# Altium PCB KAAI3020_TESTPcbDoc.PcbDoc (part 1 of 3)
Units mil, origin at the board's own origin, x right, y up, seen from the top; angles counter-clockwise.
Board outline 6000 x 5905.51 mil, 4 copper layers (Top Layer, Inner Layer L2, Inner Layer L3, Bottom Layer), stack 62.449 mil thick; 253 components, 94 nets, 550 pads, 119 vias.
Unrouted connection lines stored in the file: 5.
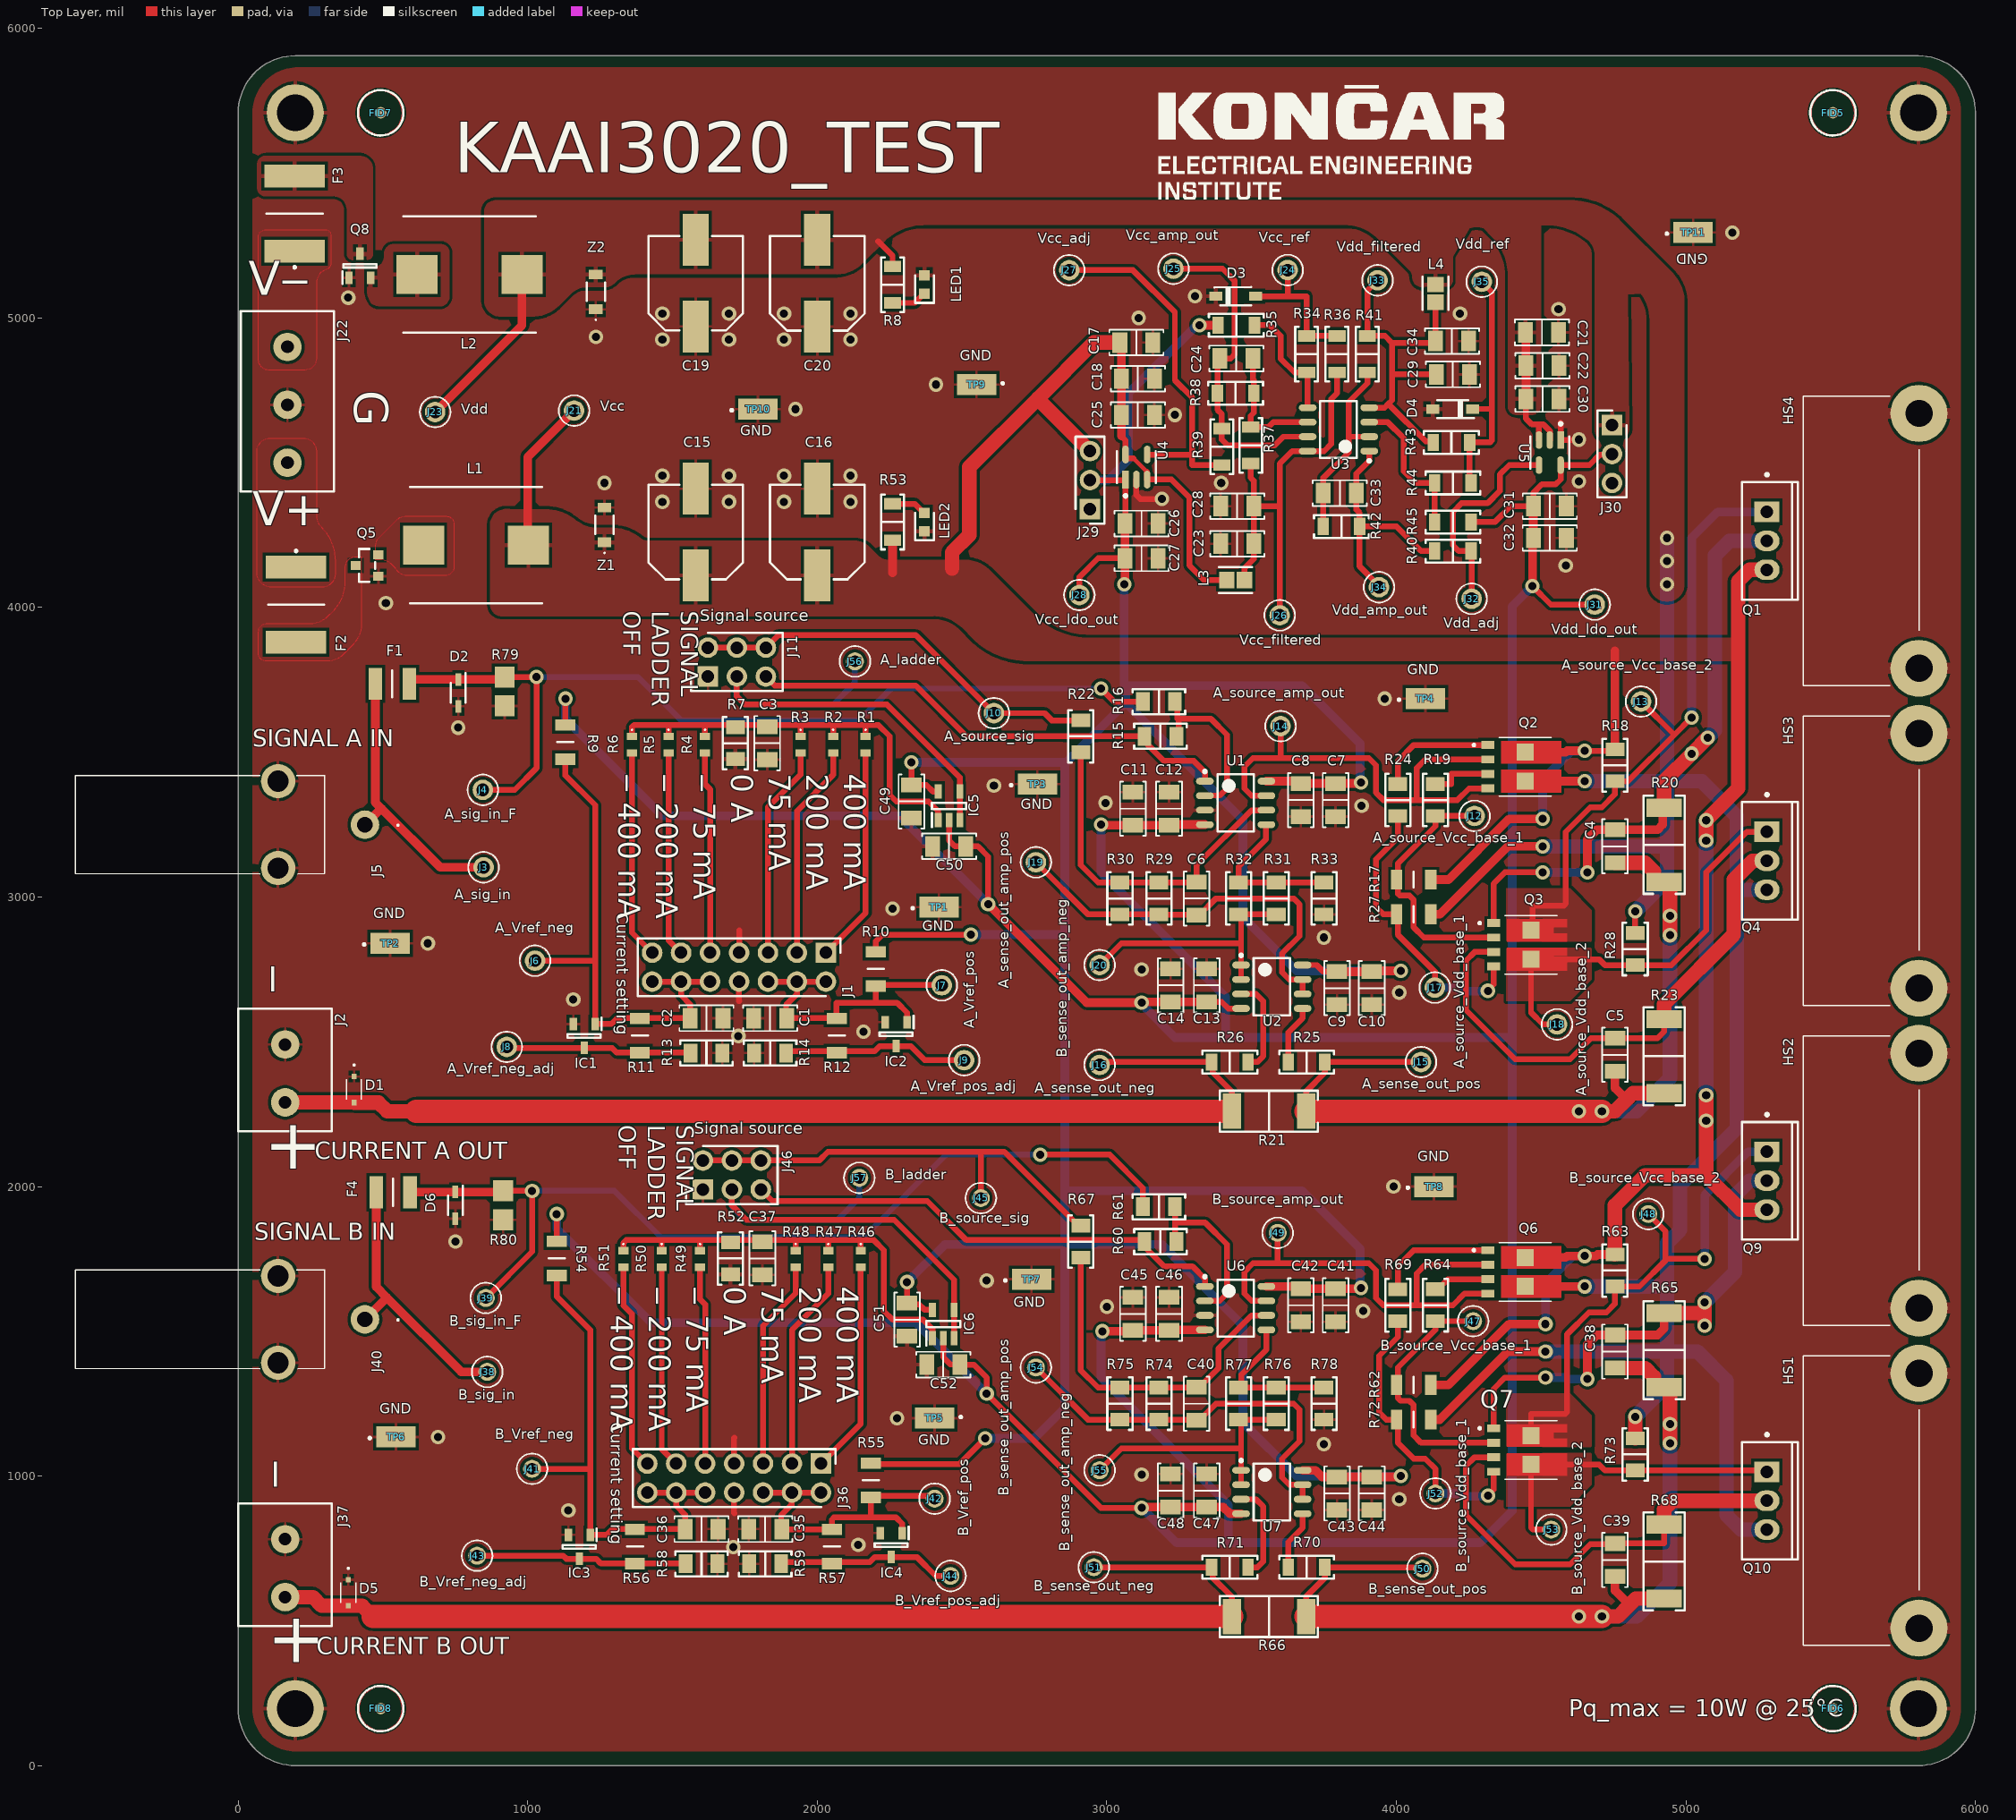
[diagram p0: Top Layer view]
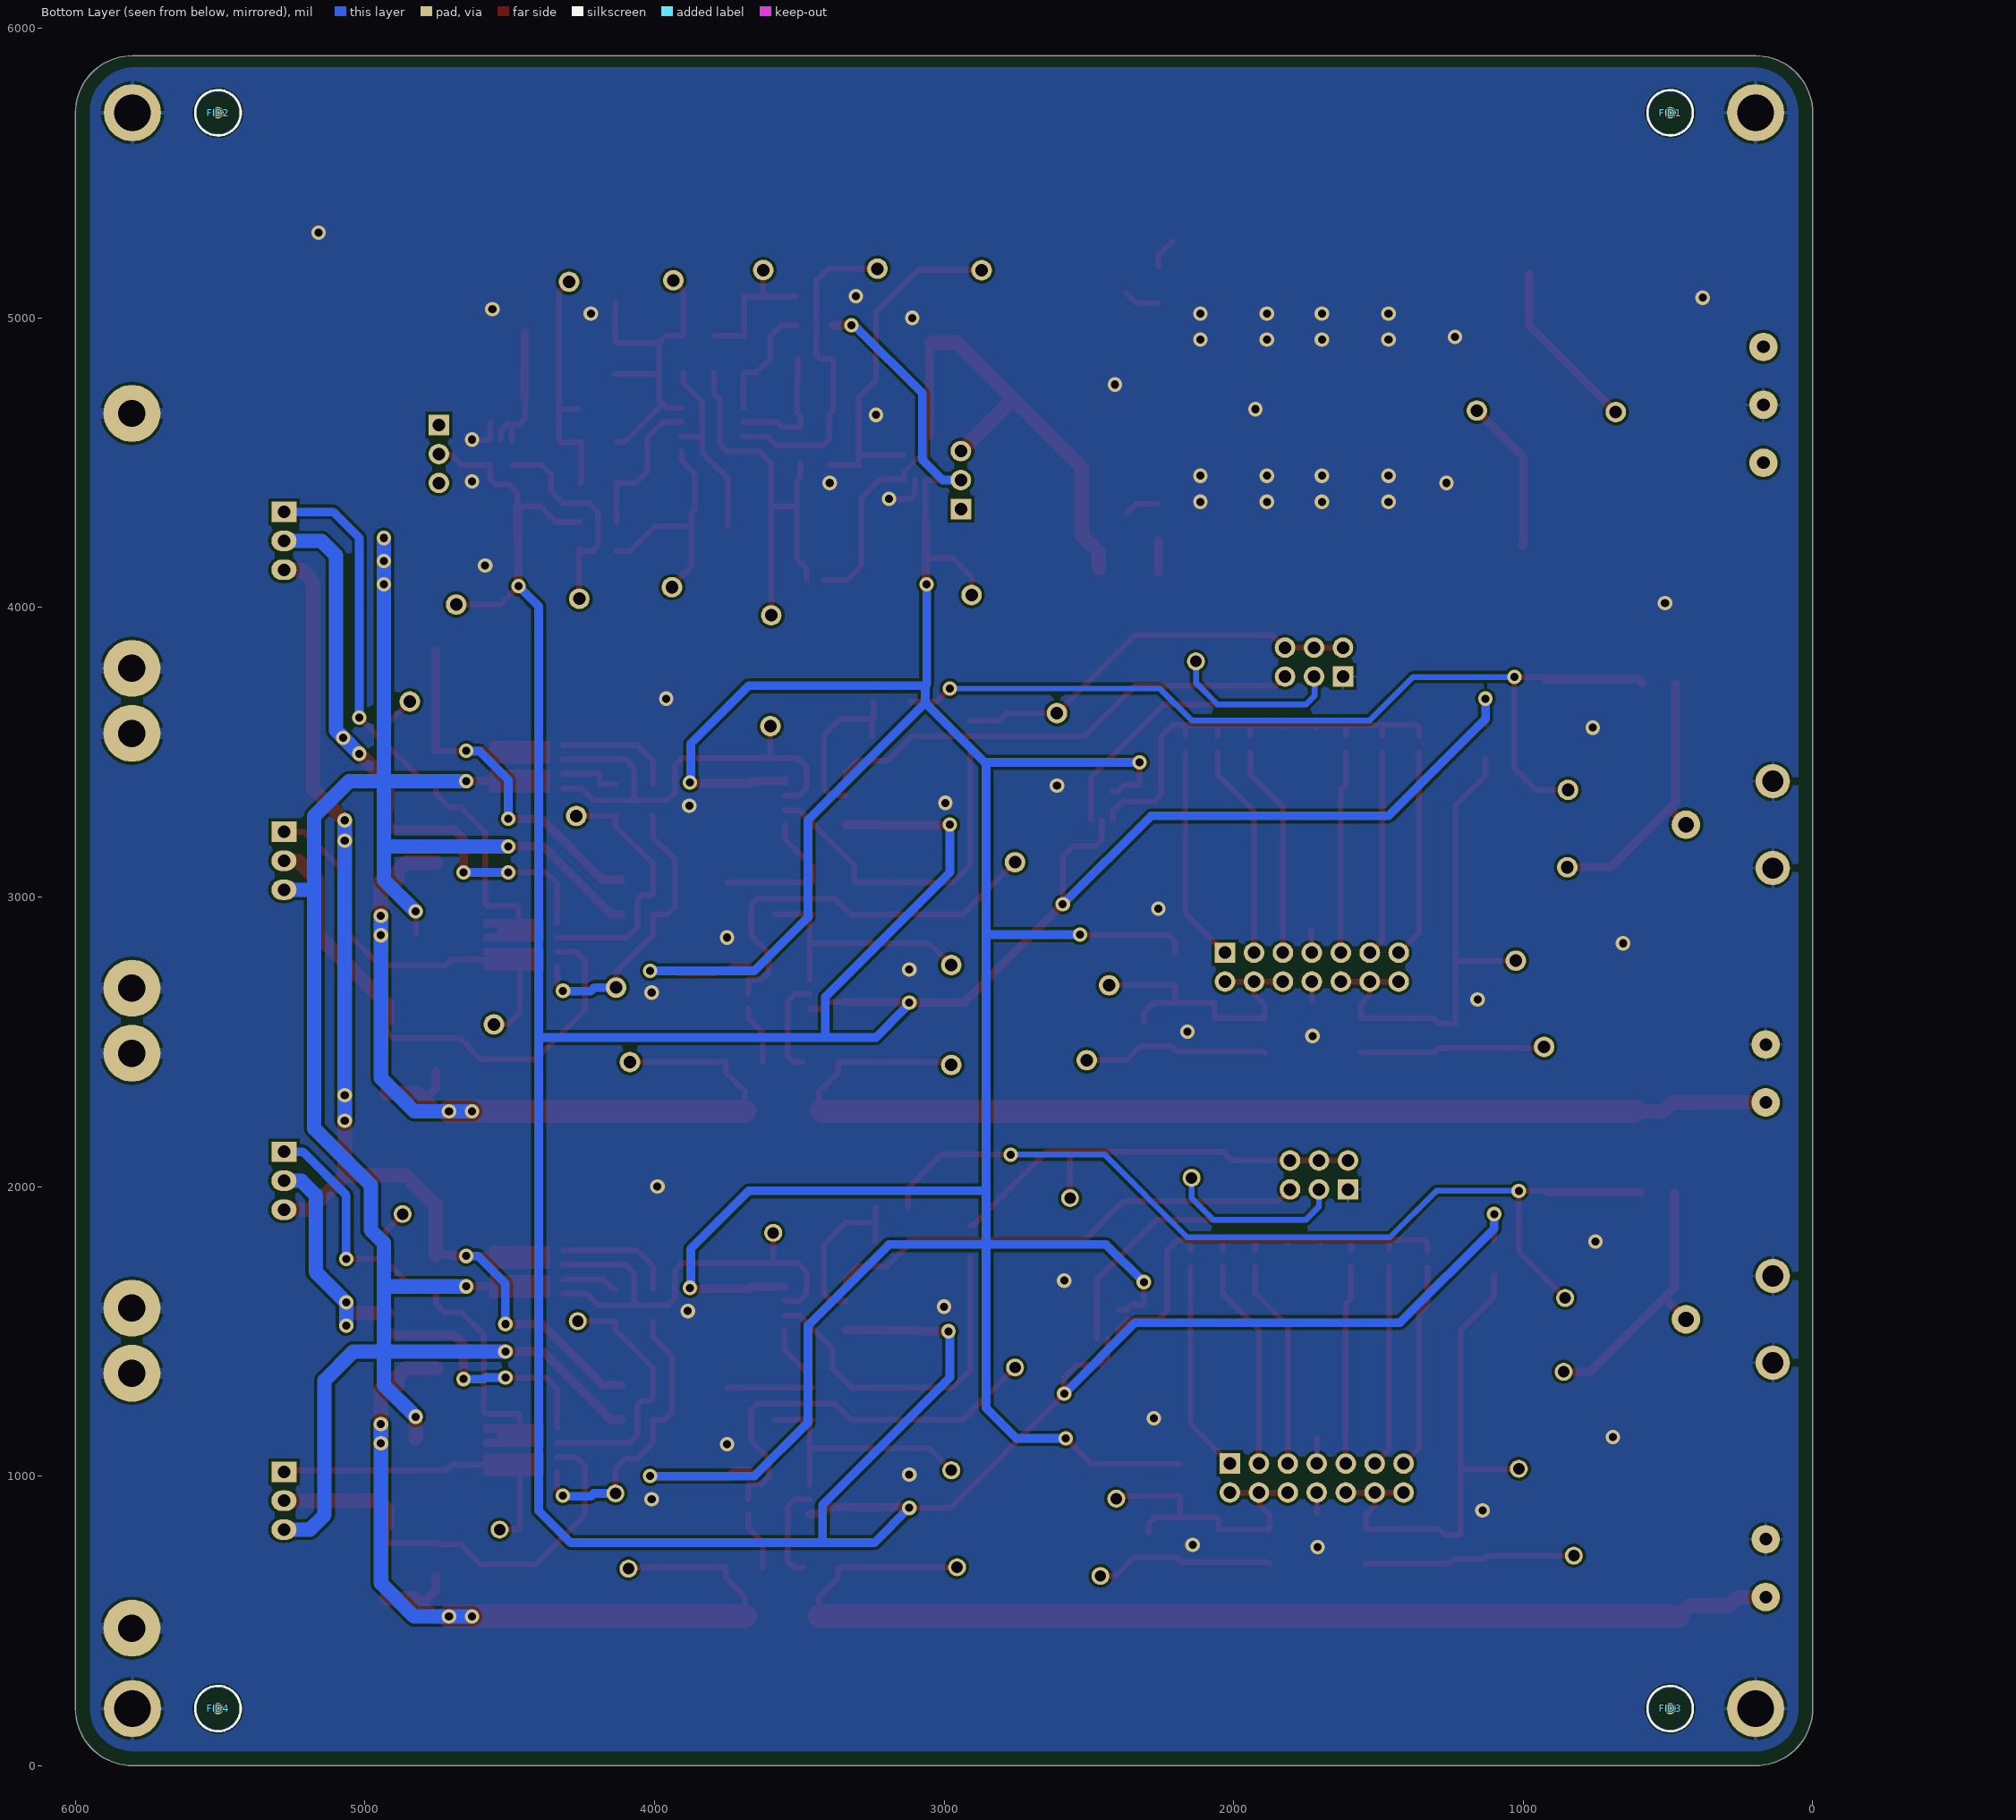
[diagram p1: Bottom Layer view, seen from below]
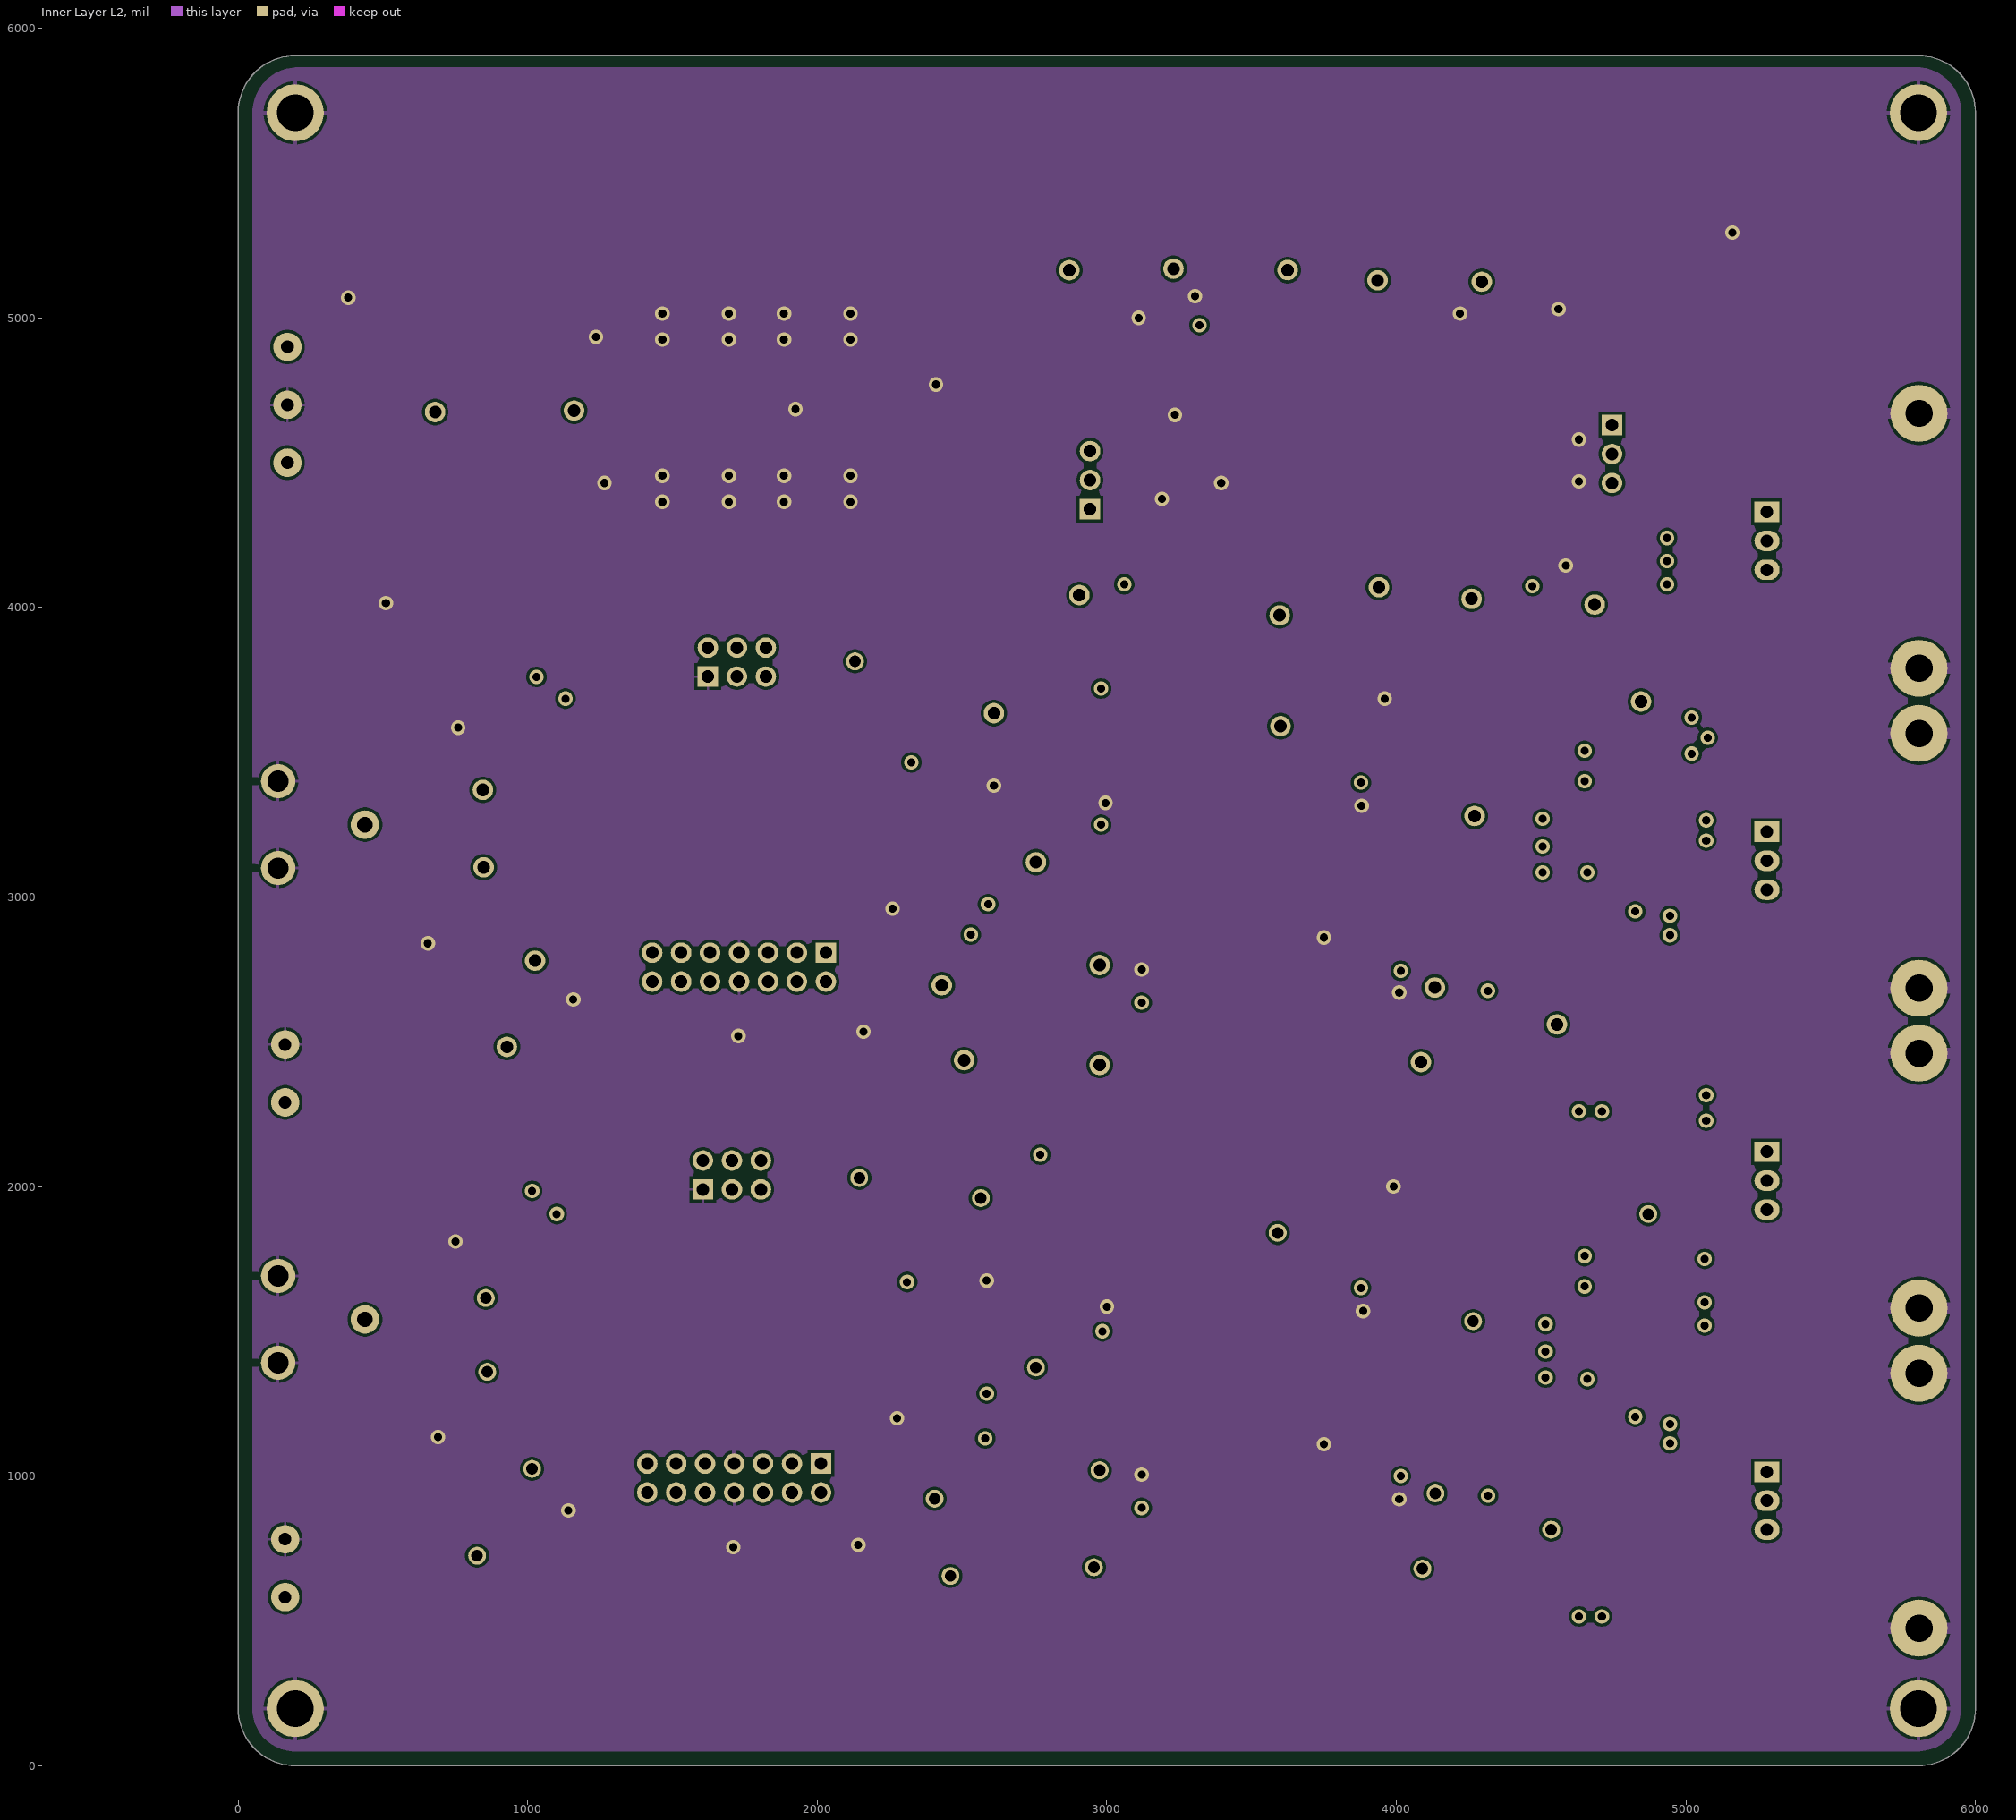
[diagram p2: Inner Layer L2]
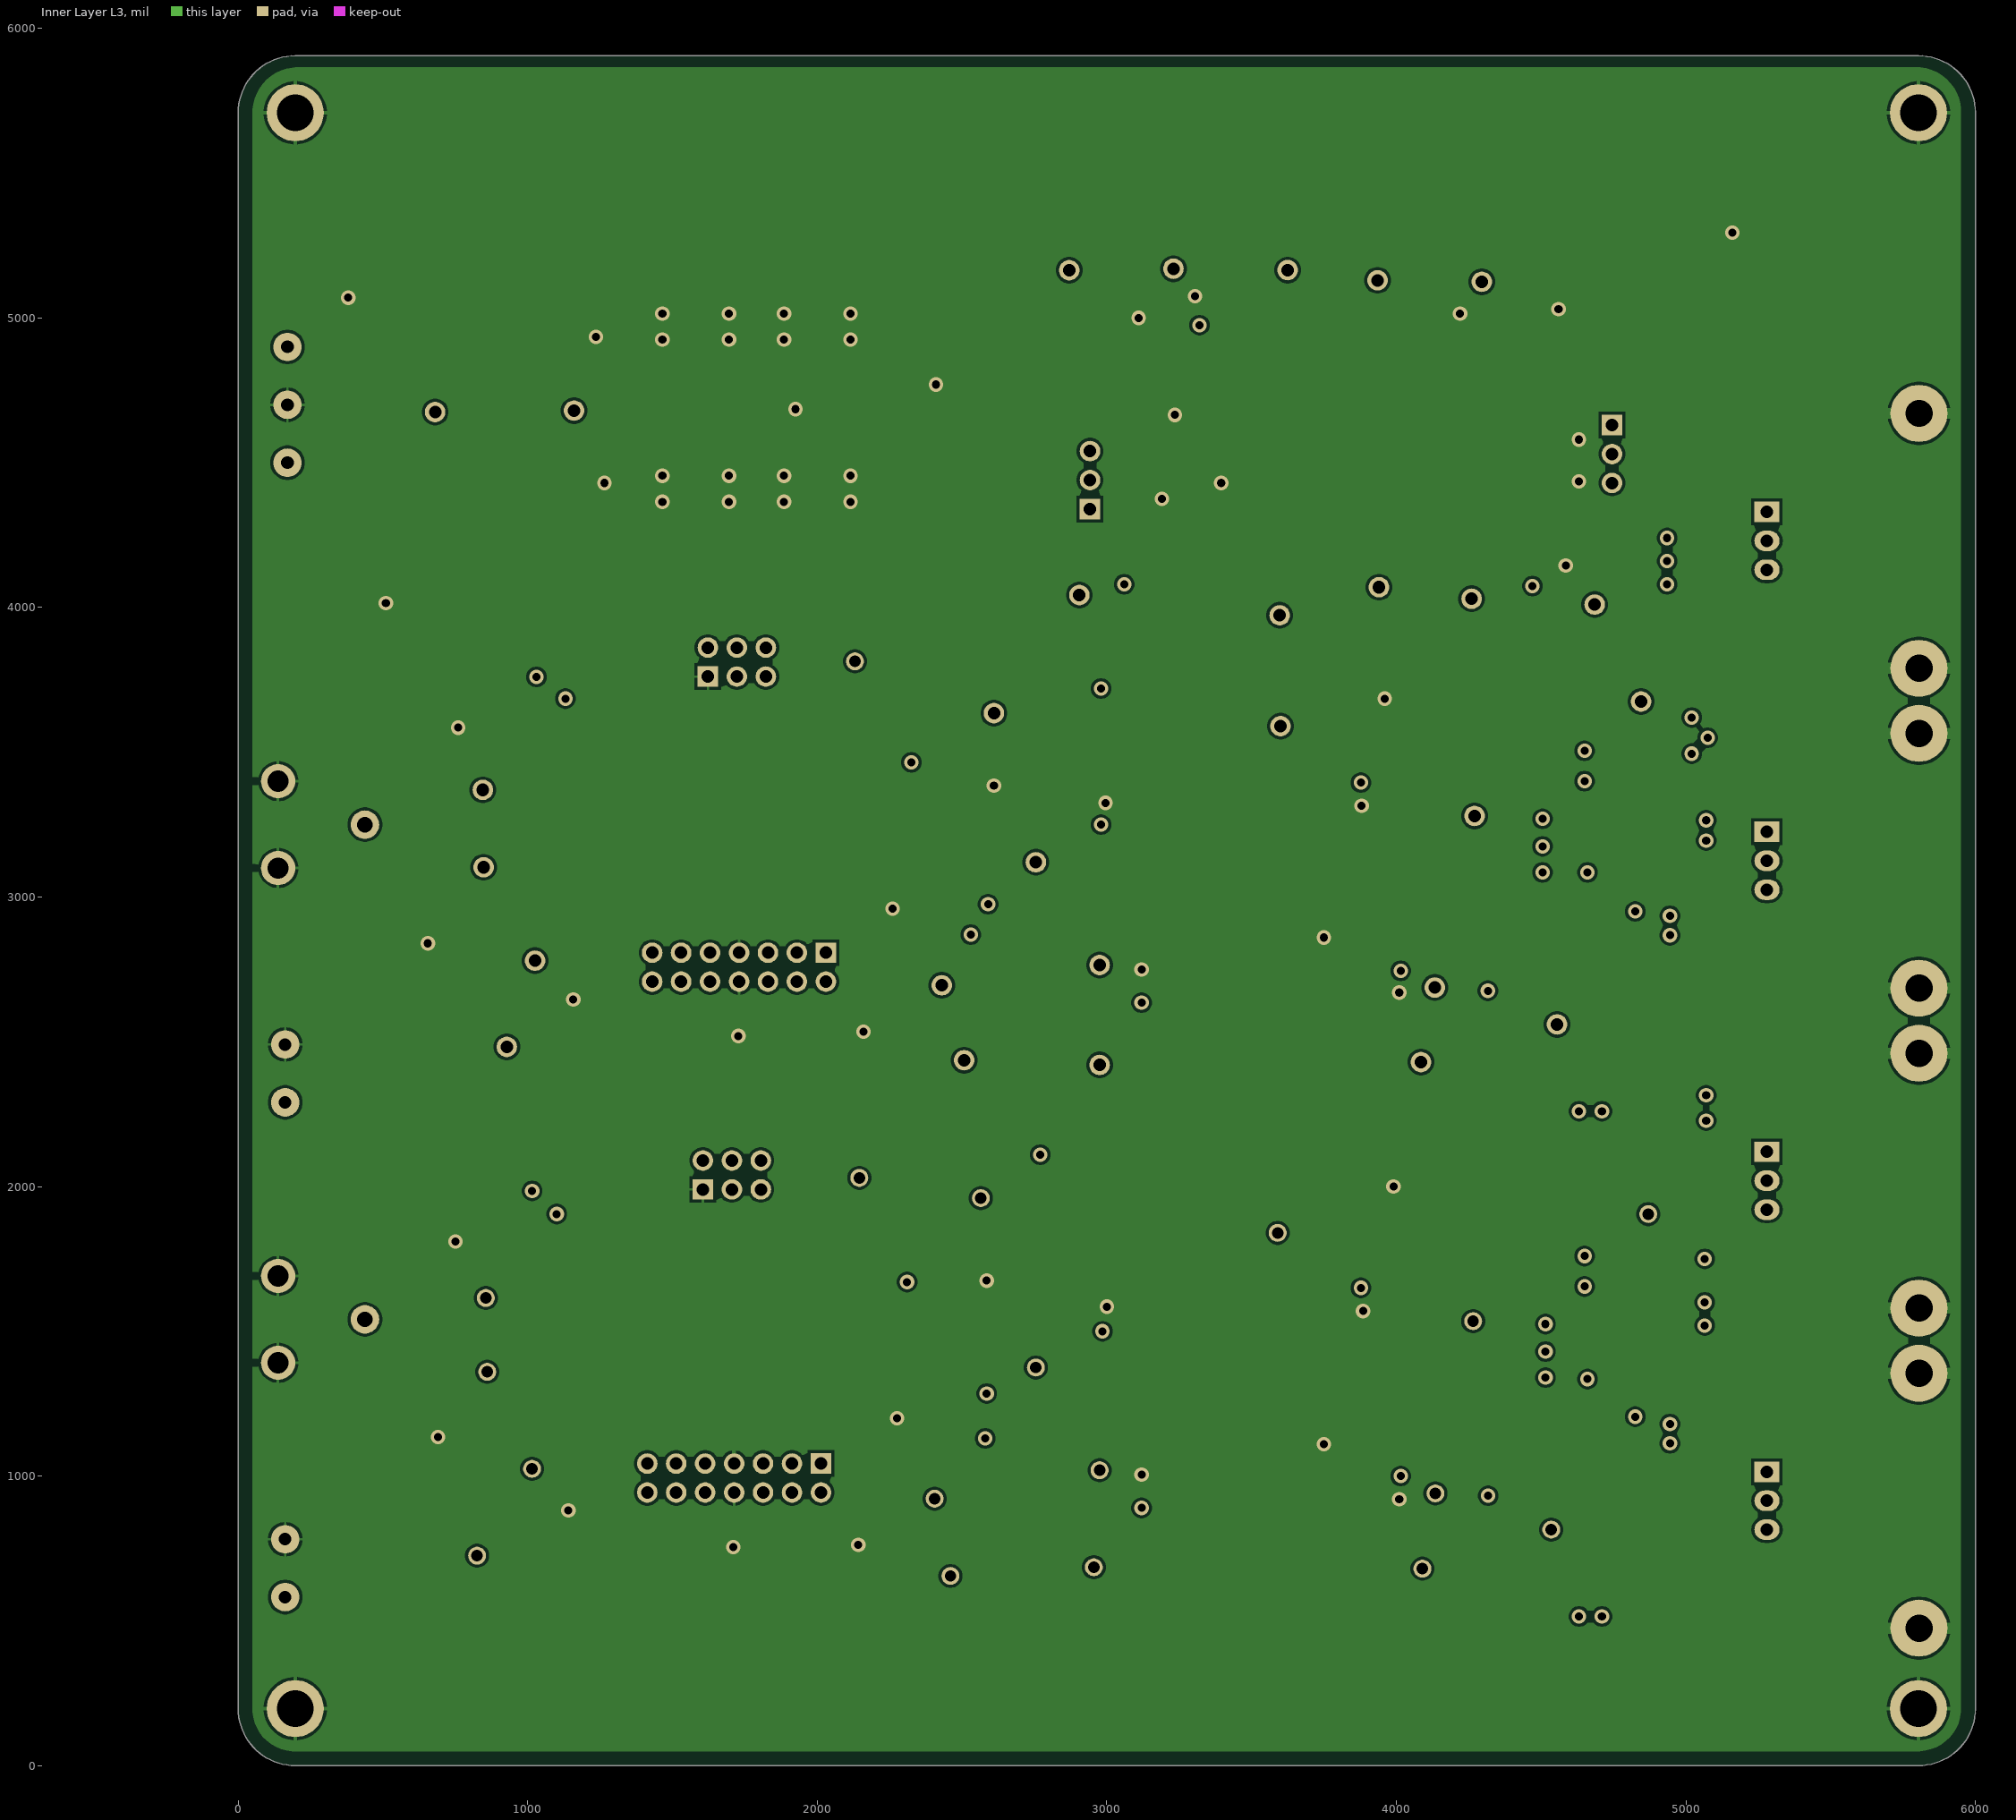
[diagram p3: Inner Layer L3]
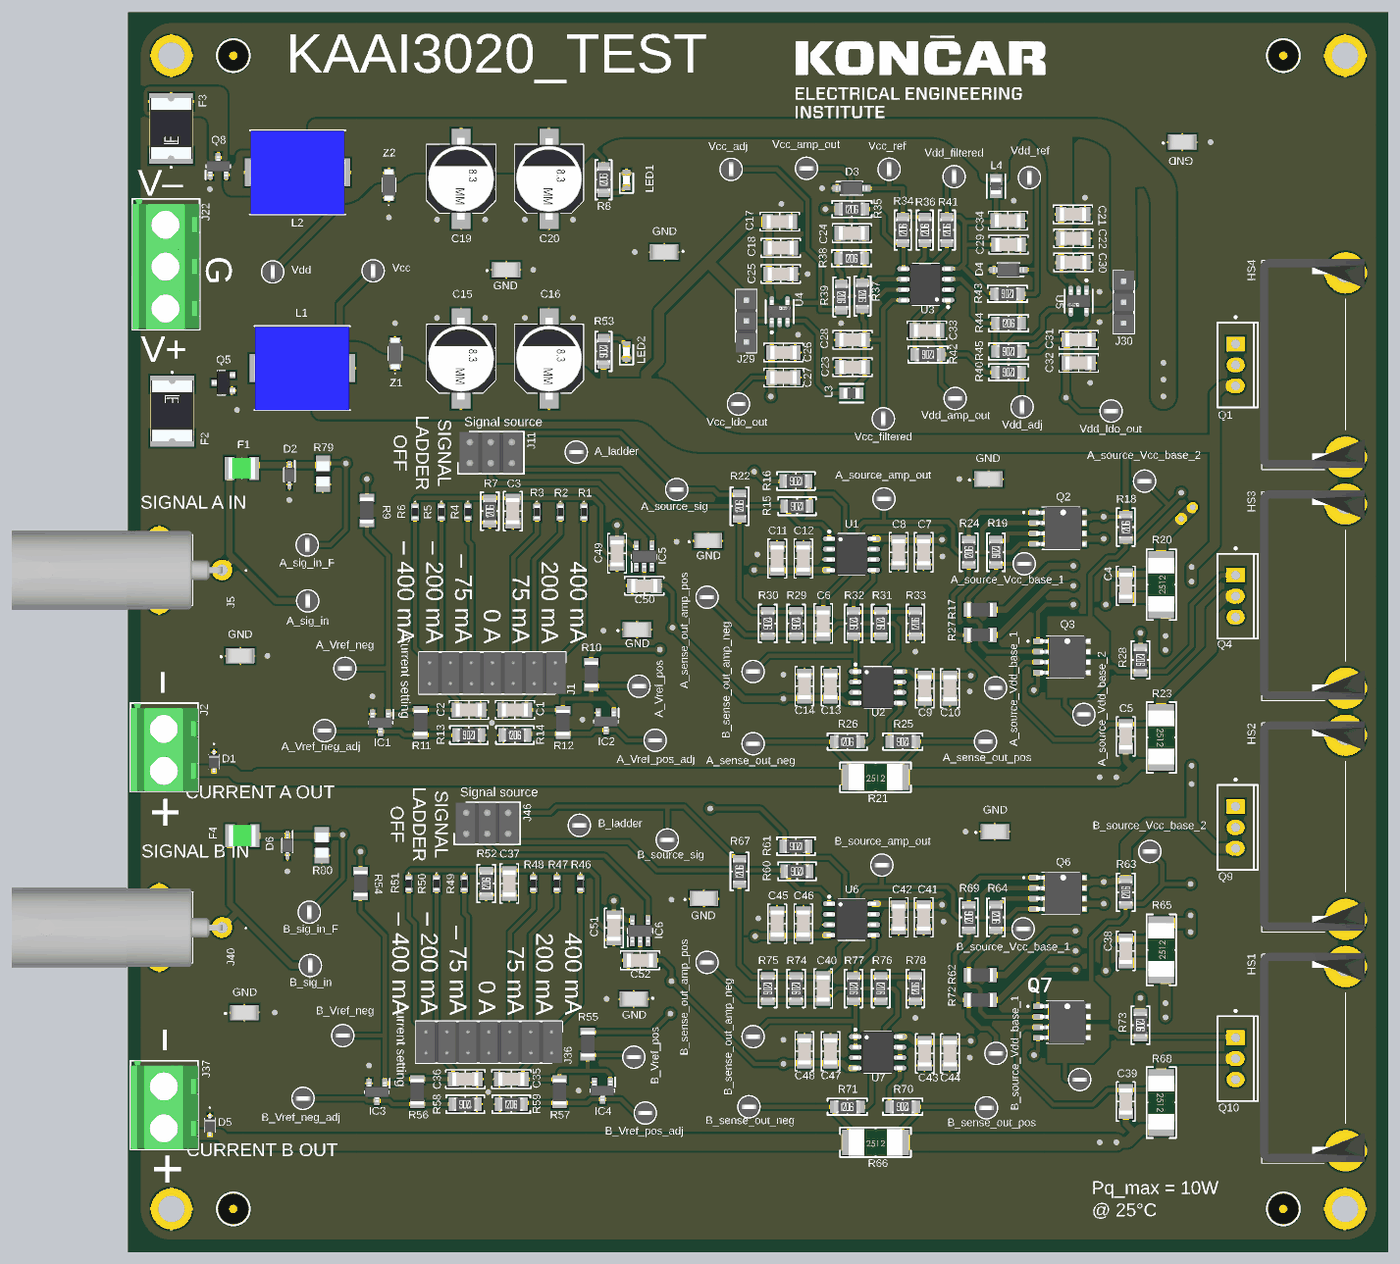
[diagram p5: 3D render of the assembled board from above, using the file's embedded part models]

## Layer stack, top to bottom
Top Solder: solder mask 0.4, Solder Resist, Dk 3.5
Top Layer: signal copper 1.378
Dielectric 2: prepreg 8.2835, PP-023, Dk 4.5
Inner Layer L2: signal copper 0.5984
Dielectric 1: core 41.9291, Core-042, Dk 4.6
Inner Layer L3: signal copper 0.5984
Dielectric 3: prepreg 8.2835, PP-023, Dk 4.5
Bottom Layer: signal copper 1.378
Bottom Solder: solder mask 0.4, Solder Resist, Dk 3.5

## Board outline
0,196.85 ccw(c196.85,196.85) 196.85,0 5803.15,0 ccw(c5803.15,196.85) 6000,196.85 6000,5708.66 ccw(c5803.15,5708.66) 5803.15,5905.51 196.85,5905.51 ccw(c196.85,5708.66) 0,5708.66

## Design rules (kind name [scope] priority, off if disabled: settings)
AcuteAngle [All] p1: minimum=8.50000000000000E+0001 checktracksonly=FALSE
BoardOutlineClearance [All AND NOT InComponentClass('OutOfBoardComponents')] p1: gap=11.81 ignorepadtopadclearanceinfootprint=FALSE except(15.75: Arc-SplitBarrior Arc-SplitContinuation Track-SplitBarrior Track-SplitContinuation SMDPad-SplitBarrior SMDPad-SplitContinuation THPad-SplitBarrior THPad-SplitContinuation Via-SplitBarrior Via-SplitContinuation Fill-SplitBarrior Fill-SplitContinuation Poly-SplitBarrior Poly-SplitContinuation Region-SplitBarrior Region-SplitContinuation Text-SplitBarrior Text-SplitContinuation)
Clearance Clearance_1 [All] p1: gap=10 ignorepadtopadclearanceinfootprint=TRUE except(0: Arc-Hole Track-Hole SMDPad-Hole THPad-Hole Via-Hole Fill-Hole Poly-Hole Region-Hole Text-Hole; 20: Track-Region SMDPad-Region Via-Region Fill-Region)
Clearance "Clearance Different Nets" [All] p2: gap=10 ignorepadtopadclearanceinfootprint=TRUE except(20: THPad-THPad Via-Hole)
Clearance "Clearance Same Nets" [All] p3: gap=7.87 ignorepadtopadclearanceinfootprint=FALSE except(3.5: Arc-Arc Arc-Track Arc-SMDPad Track-Track Track-SMDPad SMDPad-SMDPad; 5: SMDPad-Via THPad-Via; 10: Arc-Via Arc-Text Track-Via Track-Text SMDPad-Text THPad-Text Via-Via Via-Text Fill-Text Poly-Text Region-Text Text-Text)
Clearance "Clearance Bottom Layer" [OnLayer('Bottom Layer')] p4: gap=8 ignorepadtopadclearanceinfootprint=TRUE except(10: Arc-Text Track-Text SMDPad-Text THPad-Text Via-Text Fill-Text Poly-Text Region-Text Text-Text)
Clearance "Clearance Top Layer" [OnLayer('Top Layer')] p5: gap=8 ignorepadtopadclearanceinfootprint=TRUE except(10: Arc-Text Track-Text SMDPad-Text THPad-Text Via-Text Fill-Text Poly-Text Region-Text Text-Text)
Height [All] p1: minheight=0 maxheight=10000 prefheight=500
HoleSize [All] p1: absolutevalues=TRUE maxlimit=248.03 minlimit=7.87 maxpercent=80.000 minpercent=20.000
MinimumAnnularRing [All] p1: minimumring=5.12
MinimumSolderMaskSliver [All] p1: minsoldermaskwidth=3.94
PolygonConnect NoReliefPolygonConnect [InPadClass('NoThermalReliefPads') OR IsVia] p1: connectstyle=Direct reliefconductorwidth=10 reliefentries=4 polygonreliefangle="90 Angle" airgapwidth=10
PolygonConnect [All] p2: connectstyle=Relief reliefconductorwidth=15 reliefentries=4 polygonreliefangle="90 Angle" airgapwidth=10
RoutingCorners [All] p1: cornerstyle=Round minsetback=100 maxsetback=100
RoutingVias [All] p1: holewidth=19.68 width=39.37 viastyle="Through Hole" minholewidth=7.87 minwidth=13.78 maxholewidth=39.37 maxwidth=78.74
SilkToSilkClearance [All] p1: silktosilkclearance=3.94
SilkToSolderMaskClearance [IsPad] p1: minsilkscreentomaskgap=3.94 clearancetoexposedcopper=TRUE
SolderMaskExpansion [All] p1: expansion=4 istentingtop=FALSE
Width [All] p1: maxlimit=100 minlimit=3.5 preferedwidth=15
24 further rules are at their usual default settings.

## Classes and differential pairs
component class OutOfBoardComponents: J2 J5 J22 J37 J40 Q1 Q4 Q9 Q10
component class source_B: C38 C39 C40 C41 C42 C43 C44 C45 C46 C47 C48 HS3 HS4 J47 J48 J49 J50 J51 J52 J53 J54 J55 Q6 Q7 Q9 Q10 R60 R61 R62 R63 R64 R65 R66 R67 R68 R69 R70 R71 R72 R73 R74 R75 R76 R77 R78 TP7 TP8 U6 U7
component class misc_B: C35 C36 C37 C51 C52 D5 D6 F4 IC3 IC4 IC6 J36 J37 J38 J39 J40 J41 J42 J43 J44 J45 J46 J57 R46 R47 R48 R49 R50 R51 R52 R54 R55 R56 R57 R58 R59 R80 TP5 TP6
component class source_A: C4 C5 C6 C7 C8 C9 C10 C11 C12 C13 C14 HS1 HS2 J12 J13 J14 J15 J16 J17 J18 J19 J20 Q1 Q2 Q3 Q4 R15 R16 R17 R18 R19 R20 R21 R22 R23 R24 R25 R26 R27 R28 R29 R30 R31 R32 R33 TP3 TP4 U1 U2
component class misc_A: C1 C2 C3 C49 C50 D1 D2 F1 IC1 IC2 IC5 J1 J2 J3 J4 J5 J6 J7 J8 J9 J10 J11 J56 R1 R2 R3 R4 R5 R6 R7 R9 R10 R11 R12 R13 R14 R79 TP1 TP2
component class power: C15 C16 C17 C18 C19 C20 C21 C22 F2 F3 FID1 FID2 FID3 FID4 FID5 FID6 FID7 FID8 J21 J22 J23 L1 L2 LED1 LED2 Q5 Q8 R8 R53 TP9 Z1 Z2
component class LDO: C23 C24 C25 C26 C27 C28 C29 C30 C31 C32 C33 C34 D3 D4 J24 J25 J26 J27 J28 J29 J30 J31 J32 J33 J34 J35 L3 L4 R34 R35 R36 R37 R38 R39 R40 R41 R42 R43 R44 R45 TP10 TP11 U3 U4 U5

## Components (designator, comment, footprint, x,y, rotation, side; value= is the part's Value field where it differs from the comment)
C1 "1 µF" "CAP 1206_3216 - 0.8MM" 1837.16,2581.34 r180 top
C2 "1 µF" "CAP 1206_3216 - 0.8MM" 1617.16,2581.34 r180 top
C3 "0.1 µF" "CAP 1206_3216 - 0.8MM" 1827.16,3531.34 r270 top
C4 "0.1 µF" "CAP 1206_3216 - 0.8MM" 4755,3175 r90 top
C5 "0.1 µF" "CAP 1206_3216 - 0.8MM" 4755,2455 r270 top
C6 "47pF" "CAP 1206_3216 - 1.8MM" 3310,2995 r270 top
C7 "0.1 µF" "CAP 1206_3216 - 0.8MM" 3790,3335 r90 top
C8 "1 µF" "CAP 1206_3216 - 0.8MM" 3670,3335 r90 top
C9 "1 µF" "CAP 1206_3216 - 0.8MM" 3795,2685 r270 top
C10 "0.1 µF" "CAP 1206_3216 - 0.8MM" 3915,2685 r270 top
C11 "1 µF" "CAP 1206_3216 - 0.8MM" 3090,3305 r90 top
C12 "0.1 µF" "CAP 1206_3216 - 0.8MM" 3215,3305 r90 top
C13 "1 µF" "CAP 1206_3216 - 0.8MM" 3345,2695 r90 top
C14 "0.1 µF" "CAP 1206_3216 - 0.8MM" 3220,2695 r90 top
C15 "100 µF" "CAP ALSMD 8.3MM H10.5MM" 1580,4260.48 r90 top
C16 "100 µF" "CAP ALSMD 8.3MM H10.5MM" 2000,4260.48 r90 top
C17 "10 µF" "CAP 1206_3216 - 0.8MM" 3102.01,4915 r180 top
C18 "0.1 µF" "CAP 1206_3216 - 0.8MM" 3107.01,4790 r180 top
C19 "100 µF" "CAP ALSMD 8.3MM H10.5MM" 1580,5120.09 r90 top
C20 "100 µF" "CAP ALSMD 8.3MM H10.5MM" 2000,5119.61 r90 top
C21 "10 µF" "CAP 1206_3216 - 0.8MM" 4502.91,4950 r0 top
C22 "0.1 µF" "CAP 1206_3216 - 0.8MM" 4505,4835 r0 top
C23 "10 µF" "CAP 1206_3216 - 0.8MM" 3450,4220 r0 top
C24 "47pF" "CAP 1206_3216 - 1.8MM" 3447.01,4860 r180 top
C25 "2.2 µF" "CAP 1206_3216 - 0.8MM" 3107.01,4665 r180 top
C26 "2.2 µF" "CAP 1206_3216 - 0.8MM" 3120,4290 r180 top
C27 "2.2 µF" "CAP 1206_3216 - 0.8MM" 3120,4170 r180 top
C28 "0.1 µF" "CAP 1206_3216 - 0.8MM" 3450,4350 r180 top
C29 "0.1 µF" "CAP 1206_3216 - 0.8MM" 4195,4805 r180 top
C30 "2.2 µF" "CAP 1206_3216 - 0.8MM" 4505,4720 r180 top
C31 "2.2 µF" "CAP 1206_3216 - 0.8MM" 4530,4350 r180 top
C32 "2.2 µF" "CAP 1206_3216 - 0.8MM" 4530,4240 r180 top
C33 "47pF" "CAP 1206_3216 - 1.8MM" 3805,4395 r0 top
C34 "10 µF" "CAP 1206_3216 - 0.8MM" 4192.09,4920 r180 top
C35 "1 µF" "CAP 1206_3216 - 0.8MM" 1820.2,816.84 r180 top
C36 "1 µF" "CAP 1206_3216 - 0.8MM" 1600.2,816.84 r180 top
C37 "0.1 µF" "CAP 1206_3216 - 0.8MM" 1810.2,1751.84 r270 top
C38 "0.1 µF" "CAP 1206_3216 - 0.8MM" 4755,1430 r90 top
C39 "0.1 µF" "CAP 1206_3216 - 0.8MM" 4755,710 r270 top
C40 "47pF" "CAP 1206_3216 - 1.8MM" 3310,1250 r270 top
C41 "0.1 µF" "CAP 1206_3216 - 0.8MM" 3790,1590 r90 top
C42 "1 µF" "CAP 1206_3216 - 0.8MM" 3670,1590 r90 top
C43 "1 µF" "CAP 1206_3216 - 0.8MM" 3795,940 r270 top
C44 "0.1 µF" "CAP 1206_3216 - 0.8MM" 3915,940 r270 top
C45 "1 µF" "CAP 1206_3216 - 0.8MM" 3090,1560 r90 top
C46 "0.1 µF" "CAP 1206_3216 - 0.8MM" 3215,1560 r90 top
C47 "1 µF" "CAP 1206_3216 - 0.8MM" 3345,950 r90 top
C48 "0.1 µF" "CAP 1206_3216 - 0.8MM" 3220,950 r90 top
C49 "0.1 µF" "CAP 1206_3216 - 0.8MM" 2325,3330 r90 top
C50 "1 µF" "CAP 1206_3216 - 0.8MM" 2455,3175 r180 top
C51 "0.1 µF" "CAP 1206_3216 - 0.8MM" 2310,1540 r90 top
C52 "1 µF" "CAP 1206_3216 - 0.8MM" 2435,1385 r180 top
D1 "SD15C-01FTG" SD15C01FTG 400,2335 r270 top
D2 "AQW05C-01FTG" SOD2613X100N 760,3705 r270 top
D3 "MMSZ4678T1G" SOD3716X135N 3445,5075 r0 top
D4 "MMSZ4678T1G" SOD3716X135N 4195,4685 r180 top
D5 "SD15C-01FTG" SD15C01FTG 380.2,596.84 r270 top
D6 "AQW05C-01FTG" SOD2613X100N 750,1935 r270 top
F1 "0ZCH0005FF2E" FUSC3226X115N 532.16,3736.34 r0 top
F2 "2920L075DR" 2920L030DR 200,4010 r270 top
F3 "2920L075DR" 2920L030DR 195,5360 r90 top
F4 "0ZCH0005FF2E" FUSC3226X115N 535,1980 r0 top
FID1 "FID_RND" FID_RND 492.13,5708.66 r180 bottom
FID2 "FID_RND" FID_RND 5507.87,5708.66 r180 bottom
FID3 "FID_RND" FID_RND 492.13,196.85 r180 bottom
FID4 "FID_RND" FID_RND 5507.87,196.85 r180 bottom
FID5 "FID_RND" FID_RND 5507.87,5708.66 r0 top
FID6 "FID_RND" FID_RND 5507.87,196.85 r0 top
FID7 "FID_RND" FID_RND 492.13,5708.66 r0 top
FID8 "FID_RND" FID_RND 492.13,196.85 r0 top
HS1 "Heatsink" 593002B03400G 5805,1355 r270 top
HS2 "Heatsink" 593002B03400G 5805,2460.32 r270 top
HS3 "Heatsink" 593002B03400G 5805,3565.32 r270 top
HS4 "Heatsink" 593002B03400G 5805,4670.31 r270 top
IC1 "LM431CCM3" SOT96P240X110-3N 1194.96,2520 r270 top
IC2 "LM431CCM3" SOT96P240X110-3N 2272.16,2526.34 r270 top
IC3 "LM431CCM3" SOT96P240X110-3N 1177.99,755.51 r270 top
IC4 "LM431CCM3" SOT96P240X110-3N 2255.2,761.84 r270 top
IC5 "LM321SN3T1G" SOT95P275X110-5N 2455,3315 r90 top
IC6 "LM321SN3T1G" SOT95P275X110-5N 2435,1525 r90 top
J1 "TD-107-G-AA" HDRV14W46P254_2X7_1778X508X818P 2029.64,2807.6 r180 top
J2 "282837-2" "TE 282837-2" 162.16,2390.63 r90 top
J3 "A_sig_in" FP-5001-MFG#1 847.33,3102.67 r90 top
J4 "A_sig_in_F" FP-5001-MFG#1 845,3370 r90 top
J5 "5414373-1" 54143731 437.8,3250 r0 top
J6 "A_Vref_neg" FP-5001-MFG#1 1025,2780 r0 top
J7 "A_Vref_pos" FP-5001-MFG#1 2430,2695 r0 top
J8 "A_Vref_neg_adj" FP-5001-MFG#1 927.5,2482.5 r0 top
J9 "A_Vref_pos_adj" FP-5001-MFG#1 2507.16,2436.34 r0 top
J10 "A_source_sig" FP-5001-MFG#1 2610,3635 r0 top
J11 "PRT-12807" HDRV6W82P254_2X3_762X500X884P 1622.16,3761.34 r0 top
J12 "A_source_Vcc_base_1" FP-5001-MFG#1 4270,3280 r0 top
J13 "A_source_Vcc_base_2" FP-5001-MFG#1 4845,3675 r0 top
J14 "A_source_amp_out" FP-5001-MFG#1 3600,3590 r0 top
J15 "A_sense_out_pos" FP-5001-MFG#1 4085,2430 r0 top
J16 "A_sense_out_neg" FP-5001-MFG#1 2975,2420 r0 top
J17 "A_source_Vdd_base_1" FP-5001-MFG#1 4132.85,2687.15 r0 top
J18 "A_source_Vdd_base_2" FP-5001-MFG#1 4555,2560 r0 top
J19 "A_sense_out_amp_pos" FP-5001-MFG#1 2755,3120 r0 top
J20 "B_sense_out_amp_neg" FP-5001-MFG#1 2975,2765 r0 top
J21 "Vcc" FP-5001-MFG#1 1160,4680 r90 top
J22 "282837-3" "TE 282837-3" 170,4700 r90 top
J23 "Vdd" FP-5001-MFG#1 680,4675 r90 top
J24 "Vcc_ref" FP-5001-MFG#1 3624.6,5165.4 r270 top
J25 "Vcc_amp_out" FP-5001-MFG#1 3230,5170 r0 top
J26 "Vcc_filtered" FP-5001-MFG#1 3597.01,3972.99 r270 top
J27 "Vcc_adj" FP-5001-MFG#1 2870,5165 r270 top
J28 "Vcc_ldo_out" FP-5001-MFG#1 2905,4043.11 r0 top
J29 "M20-9990346" "HDRV3W64P0X254_1X3_762X254X864P - duplicate" 2942.01,4340 r90 top
J30 "M20-9990346" "HDRV3W64P0X254_1X3_762X254X864P - duplicate" 4745,4630 r270 top
J31 "Vdd_ldo_out" FP-5001-MFG#1 4685,4010 r0 top
J32 "Vdd_adj" FP-5001-MFG#1 4260,4030 r270 top
J33 "Vdd_filtered" FP-5001-MFG#1 3935,5130 r270 top
J34 "Vdd_amp_out" FP-5001-MFG#1 3940,4070 r0 top
J35 "Vdd_ref" FP-5001-MFG#1 4295,5125 r270 top
J36 "TD-107-G-AA" HDRV14W46P254_2X7_1778X508X818P 2012.68,1043.1 r180 top
J37 "282837-2" "TE 282837-2" 162.16,681.84 r90 top
J38 "B_sig_in" FP-5001-MFG#2 860,1360 r90 top
J39 "B_sig_in_F" FP-5001-MFG#2 855,1615 r90 top
J40 "5414373-1" 54143731 437.8,1541.21 r0 top
J41 "B_Vref_neg" FP-5001-MFG#2 1015,1025 r0 top
J42 "B_Vref_pos" FP-5001-MFG#2 2405.2,921.84 r0 top
J43 "B_Vref_neg_adj" FP-5001-MFG#2 825,725 r0 top
J44 "B_Vref_pos_adj" FP-5001-MFG#2 2460,655 r0 top
J45 "B_source_sig" FP-5001-MFG#2 2565,1960 r0 top
J46 "PRT-12807" HDRV6W82P254_2X3_762X500X884P 1605,1990 r0 top
J47 "B_source_Vcc_base_1" FP-5001-MFG#2 4265,1535 r0 top
J48 "B_source_Vcc_base_2" FP-5001-MFG#2 4870,1905 r0 top
J49 "B_source_amp_out" FP-5001-MFG#2 3590,1840 r0 top
J50 "B_sense_out_pos" FP-5001-MFG#2 4090,680 r0 top
J51 "B_sense_out_neg" FP-5001-MFG#2 2955,685 r0 top
J52 "B_source_Vdd_base_1" FP-5001-MFG#2 4135,940 r0 top
J53 "B_source_Vdd_base_2" FP-5001-MFG#2 4535,815 r0 top
J54 "B_sense_out_amp_pos" FP-5001-MFG#2 2755,1375 r0 top
J55 "B_sense_out_amp_neg" FP-5001-MFG#2 2975,1020 r0 top
J56 "A_ladder" FP-5001-MFG#2 2130.11,3813.78 r0 top
J57 "B_ladder" FP-5001-MFG#2 2145,2030 r0 top
L1 "33uH" INDPM116102X400N 821.1,4215 r0 top
L2 "33uH" INDPM116102X400N 798.9,5150.48 r180 top
L3 "MLZ2012M3R3HT000" FP-MLZ2012-1_25-IPC_B 3445,4095 r0 top value=3.3uH
L4 "MLZ2012M3R3HT000" FP-MLZ2012-1_25-IPC_B 4135,5085 r270 top value=3.3uH
LED1 "LTST-C191KRKT" LEDC1608X55N 2370,5115 r90 top
LED2 "LTST-C191KRKT" LEDC1608X55N 2370,4295 r90 top
Q1 "TIP32C" ONSC-TO-220-3-221A-09 5280,4230.16 r0 top
Q2 "PHPT610030NPKX" TRANS_BUK9K18-40E,115 4445,3450 r0 top
Q3 "PHPT610030NPKX" TRANS_BUK9K18-40E,115 4465,2835 r0 top
Q4 "TIP31C" ONSC-TO-220-3-221A-09 5280,3125.05 r0 top
Q5 "DIODES MOSFET P-CH SOT-23-3" "DIODES SOT-23-3" 445,4145 r180 top
Q6 "PHPT610030NPKX" TRANS_BUK9K18-40E,115 4445,1705 r0 top
Q7 "PHPT610030NPKX" TRANS_BUK9K18-40E,115 4465,1090 r0 top
Q8 "DMG3406L-13" SOT96P240X110-3N 420,5180 r90 top
Q9 "TIP32C" ONSC-TO-220-3-221A-09 5280,2019.95 r0 top
Q10 "TIP31C" ONSC-TO-220-3-221A-09 5280,914.84 r0 top
R1 "3 kOhm" ERA3AEB101V 2167.16,3526.34 r270 top
R2 "7.96 kOhm" ERA3AEB101V 2054.66,3526.34 r270 top
R3 "24.6 kOhm" ERA3AEB101V 1942.16,3526.34 r270 top
R4 "24.6 kOhm" ERA3AEB101V 1612.16,3526.34 r270 top
R5 "7.96 kOhm" ERA3AEB101V 1486.08,3526.34 r270 top
R6 "3 kOhm" ERA3AEB101V 1360,3526.34 r270 top
R7 "2 kOhms" "RES 1206_3216" 1717.16,3531.34 r90 top
R8 "680 Ohms" "YAGEO RES 1206_3216" 2260,5115 r90 top
R9 "2.2 kOhm" RESC3116X65N 1130,3535 r90 top
R10 "2.2 kOhm" RESC3116X65N 2202.16,2751.34 r90 top
R11 "400" RESC3116X65N 1387.16,2521.34 r90 top
R12 "400" RESC3116X65N 2067.16,2521.34 r90 top
R13 "2 kOhms" "RES 1206_3216" 1617.16,2461.34 r180 top
R14 "2 kOhms" "RES 1206_3216" 1837.16,2461.34 r0 top
R15 "12 kOhms" "RES 1206_3216" 3185,3555 r180 top
R16 "12 kOhms" "RES 1206_3216" 3180,3675 r180 top
R17 "2.2 kOhm" RESC3116X65N 4060,3060 r0 top
R18 "51 Ohms" "RES 1206_3216" 4755,3455 r90 top
R19 "5.1 Ohms" "RES 1206_3216" 4135,3335 r270 top
R20 "330 mOhms" "STACKPOLE CSR2512" 4925,3180 r90 top
R21 "500 mOhms" "STACKPOLE CSR2512" 3560,2260 r0 top
R22 "12 kOhms" "RES 1206_3216" 2910,3554.88 r90 top
R23 "330 mOhms" "STACKPOLE CSR2512" 4925,2450 r270 top
R24 "5.1 Ohms" "RES 1206_3216" 4005,3334.88 r90 top
R25 "3.3 kOhms" "YAGEO RES 1206_3216" 3690,2430 r180 top
R26 "3.3 kOhms" "YAGEO RES 1206_3216" 3425,2430 r0 top
R27 "2.2 kOhm" RESC3116X65N 4060,2940 r180 top
R28 "51 Ohms" "RES 1206_3216" 4825,2820 r270 top
R29 "2 kOhms" "RES 1206_3216" 3180,2995 r270 top
R30 "1 kOhms" "RES 1206_3216" 3045,2995 r270 top
R31 "2 kOhms" "RES 1206_3216" 3585,2995 r270 top
R32 "1 kOhms" "RES 1206_3216" 3455,2995 r270 top
R33 "12 kOhms" "RES 1206_3216" 3750,2995 r90 top
R34 "10 kOhms" "YAGEO RES 1206_3216" 3690,4875 r90 top
R35 "10 kOhms" "YAGEO RES 1206_3216" 3447.01,4975 r0 top
R36 "2.2 kOhms" "YAGEO RES 1206_3216" 3795,4875 r90 top
R37 "10 kOhms" "YAGEO RES 1206_3216" 3497.01,4560 r270 top
R38 "10 kOhms" "YAGEO RES 1206_3216" 3445,4740 r0 top
R39 "3.3 kOhms" "YAGEO RES 1206_3216" 3397.01,4555 r270 top
R40 "3.3 kOhms" "YAGEO RES 1206_3216" 4195,4195 r180 top
R41 "10 kOhms" "YAGEO RES 1206_3216" 3900,4875 r90 top
R42 "10 kOhms" "YAGEO RES 1206_3216" 3810,4280 r180 top
R43 "2.2 kOhms" "YAGEO RES 1206_3216" 4190,4570 r180 top
R44 "10 kOhms" "YAGEO RES 1206_3216" 4195,4430 r0 top
R45 "10 kOhms" "YAGEO RES 1206_3216" 4195,4295 r180 top
R46 "3 kOhm" ERA3AEB101V 2150.2,1750 r270 top
R47 "7.96 kOhm" ERA3AEB101V 2037.7,1750 r270 top
R48 "24.6 kOhm" ERA3AEB101V 1925.2,1750 r270 top
R49 "24.6 kOhm" ERA3AEB101V 1595.2,1750 r270 top
R50 "7.96 kOhm" ERA3AEB101V 1462.6,1750 r270 top
R51 "3 kOhm" ERA3AEB101V 1330,1750 r270 top
R52 "2 kOhms" "RES 1206_3216" 1700.2,1751.84 r90 top
R53 "680 Ohms" "YAGEO RES 1206_3216" 2260,4295 r270 top
R54 "2.2 kOhm" RESC3116X65N 1100,1751.84 r90 top
R55 "2.2 kOhm" RESC3116X65N 2185,985 r90 top
R56 "400" RESC3116X65N 1370.2,756.84 r90 top
R57 "400" RESC3116X65N 2050.2,756.84 r90 top
R58 "2 kOhms" "RES 1206_3216" 1600.2,696.84 r180 top
R59 "2 kOhms" "RES 1206_3216" 1820.2,696.84 r0 top
R60 "12 kOhms" "RES 1206_3216" 3185,1810 r180 top
R61 "12 kOhms" "RES 1206_3216" 3180,1930 r180 top
R62 "2.2 kOhm" RESC3116X65N 4060,1315 r0 top
R63 "51 Ohms" "RES 1206_3216" 4755,1710 r90 top
R64 "5.1 Ohms" "RES 1206_3216" 4135,1590 r270 top
R65 "330 mOhms" "STACKPOLE CSR2512" 4925,1435 r90 top
R66 "500 mOhms" "STACKPOLE CSR2512" 3560,515 r0 top
R67 "12 kOhms" "RES 1206_3216" 2910,1809.88 r90 top
R68 "330 mOhms" "STACKPOLE CSR2512" 4925,705 r270 top
R69 "5.1 Ohms" "RES 1206_3216" 4005,1589.88 r90 top
R70 "3.3 kOhms" "YAGEO RES 1206_3216" 3690,685 r180 top
R71 "3.3 kOhms" "YAGEO RES 1206_3216" 3425,685 r0 top
R72 "2.2 kOhm" RESC3116X65N 4060,1195 r180 top
R73 "51 Ohms" "RES 1206_3216" 4825,1075 r270 top
R74 "2 kOhms" "RES 1206_3216" 3180,1250 r270 top
R75 "1 kOhms" "RES 1206_3216" 3045,1250 r270 top
R76 "2 kOhms" "RES 1206_3216" 3585,1250 r270 top
R77 "1 kOhms" "RES 1206_3216" 3455,1250 r270 top
R78 "12 kOhms" "RES 1206_3216" 3750,1250 r90 top
R79 "TFHP1206D-50RFT5" RESC3016X58N 920,3710 r90 top
R80 "TFHP1206D-50RFT5" RESC3016X58N 915,1935 r90 top
TP1 "GND" S175146R 2420,2965 r180 top
TP2 "GND" S175146R 525,2840 r180 top
TP3 "GND" S175146R 2760,3390 r180 top
TP4 "GND" S175146R 4100,3685 r180 top
TP5 "GND" S175146R 2405,1200 r0 top
TP6 "GND" S175146R 545,1135 r180 top
TP7 "GND" S175146R 2740,1680 r180 top
TP8 "GND" S175146R 4130,2000 r180 top
TP9 "GND" S175146R 2550,4770 r0 top
TP10 "GND" S175146R 1795,4685 r180 top
TP11 "GND" S175146R 5025,5295 r180 top
U1 "TLV9362" SOIC8-127P600X175-8N 3445,3325 r0 top
U2 "TLV9362" SOIC8-127P600X175-8N 3570,2690 r0 top
U3 "TLV9362" SOIC8-127P600X175-8N 3800,4615 r180 top
U4 "ST730MR" FP-UJ-5-IPC_B 3102.01,4485 r90 top
U5 "ADP7182AUJZ-R7" FP-UJ-5-IPC_B 4530,4535 r270 top
U6 "TLV9362" SOIC8-127P600X175-8N 3445,1580 r0 top
U7 "TLV9362" SOIC8-127P600X175-8N 3570,945 r0 top
Z1 "SMF15VTFTR" SMF15VTFTR 1265,4285 r180 top
Z2 "SMF15VTFTR" SMF15VTFTR 1235,5090 r180 top

## Footprints (in the part's own frame and the unit in brackets; to place one, negate y for a bottom-side part, rotate by r counter-clockwise, add the part's x,y. Pads: shape width x height; smd on the part's side, far side on the other; paste and mask are expansions set on the pad)
2920L030DR [mm]
  rect 2x5.3 smd: 1(-3.3,0) 2(3.3,0)
  silkscreen extent -4.8,-2.46 0,2.46, body extent -3.68,-2.6 3.7,2.6, height 1.25
593002B03400G [mm]
  round 5 hole 2.39: 1(0,0) 2(22.36,0)
  silkscreen extent -1.52,-10.16 23.88,0, body extent -1.68,-10.38 23.72,2.32, height 33.36
54143731 [mm]
  round 2.5 hole 1.37: 1(0,0)
  round 3 hole 1.86: 2(-7.62,3.81) 3(-7.62,-3.81)
  silkscreen extent -25.4,-4.32 2.95,4.32, body extent -25.52,-4.83 0.03,4.83, height 9.3
"CAP 1206_3216 - 0.8MM" [mm] "Chip Capacitor, 2-Leads, Body 3.25x1.60mm, IPC Medium Density"
  rect 1.3x1.8 smd: 1(-1.45,0) 2(1.45,0)
  silkscreen extent -2.37,-1.12 2.37,1.12, body extent -1.6,-0.8 1.6,0.8, height 0.8
"CAP 1206_3216 - 1.8MM" [mm] "Chip Capacitor, 2-Leads, Body 3.25x1.60mm, IPC Medium Density"
  rect 1.3x1.8 smd: 1(-1.45,0) 2(1.45,0)
  silkscreen extent -2.38,-1.13 2.38,1.13, body extent -1.6,-0.8 1.6,0.8, height 1.8
"CAP ALSMD 8.3MM H10.5MM" [mm] "Aluminum Electrolytic Capacitor, Body 8.30x8.30x10.50mm, IPC Low Density"
  rect 4.55x2.3 smd: 1(-3.8,0) 2(3.8,0)
  silkscreen extent -4.15,-4.15 4.15,4.15, body extent -4.95,-4.15 4.95,4.15, height 10.5
"DIODES SOT-23-3" [mm] "SOT23, 3-Leads, Body 2.90x2.40mm, Pitch 0.95mm, IPC Medium Density"
  rect 0.9x0.8 smd: 1(-1,0.95) 2(-1,-0.95) 3(1,0)
  silkscreen extent -0.7,-1.45 0.7,1.45, body extent -1.41,-1.45 1.41,1.45, height 1.5
ERA3AEB101V [mm]
  rect 0.65x0.9 smd: 1(-0.725,0) 2(0.725,0)
  silkscreen extent -1.35,-0.05 -1.25,0.05, body extent -0.8,-0.4 0.8,0.4, height 0.45
FID_RND [mm]
  round 1 smd paste-1 mask+1.5: FID1(0,0)
  silkscreen extent -2,-2 2,2
FP-5001-MFG#1 [mm]
  round 1.8 hole 1.1 paste-2539.97 mask+0: 1(0,0)
  silkscreen extent -1.34,-1.35 1.34,1.35, body extent -1.45,-1.45 1.45,1.45, height 0.25
FP-5001-MFG#2 [mm]
  round 1.57 hole 1.016 paste-2539.97 mask+0: 1(0,0)
  silkscreen extent -1.34,-1.35 1.34,1.35, body extent -1.45,-1.45 1.45,1.45, height 0.25
FP-MLZ2012-1_25-IPC_B [mil]
  rect 53.32x57.33 smd paste+0 mask+0: 1(-30.55,0) 2(30.55,0)
  silkscreen extent -57,-44 57,44, body extent -67,-39 67,39, height 10
FP-UJ-5-IPC_B [mm]
  rect 1.554x0.572 smd paste+0 mask+0: 1(-1.1,0.95)
  rrect100% 1.554x0.572 smd paste+0 mask+0: 2(-1.1,0) 3(-1.1,-0.95) 4(1.1,-0.95) 5(1.1,0.95)
  silkscreen extent -2.65,-1.7 1.4,1.7, body extent -2.13,-1.7 2.13,1.7, height 0.25
FUSC3226X115N [mm]
  rect 1.18x2.81 smd: 1(-1.485,0) 2(1.485,0)
  silkscreen extent 0,-1.19 0,1.19, body extent -1.61,-1.29 1.61,1.29, height 1.15
"HDRV3W64P0X254_1X3_762X254X864P - duplicate" [mm]
  rect 1.8x1.8 hole 1.1: 1(0,0)
  round 1.8 hole 1.1: 2(2.54,0) 3(5.08,0)
  silkscreen extent -1.27,-1.27 6.35,1.27, body extent -1.27,-1.27 6.35,1.27, height 8.64
HDRV6W82P254_2X3_762X500X884P [mm]
  rect 1.8x1.8 hole 1.1: 1(0,0)
  round 1.8 hole 1.1: 2(0,2.54) 3(2.54,0) 4(2.54,2.54) 5(5.08,0) 6(5.08,2.54)
  silkscreen extent -1.47,-1.28 6.55,3.82, body extent -1.27,-1.23 6.35,3.77, height 8.84
HDRV14W46P254_2X7_1778X508X818P [mm]
  rect 1.8x1.8 hole 1.1: 1(0,0)
  round 1.8 hole 1.1: 2(0,2.54) 3(2.54,0) 4(2.54,2.54) 5(5.08,0) 6(5.08,2.54) 7(7.62,0) 8(7.62,2.54) 9(10.16,0) 10(10.16,2.54) 11(12.7,0) 12(12.7,2.54) 13(15.24,0) 14(15.24,2.54)
  silkscreen extent -1.27,-1.27 16.51,3.81, body extent -1.27,-1.27 16.51,3.81, height 8.18
INDPM116102X400N [mm]
  rect 3.6x3.4 smd: 1(-4.6,0) 2(4.6,0)
  silkscreen extent -5.8,-5.1 5.8,5.1, body extent -5.8,-5.1 5.8,5.1, height 4
LEDC1608X55N [mm]
  rect 0.9x0.95 smd: 1(-0.8,0) 2(0.8,0)
  silkscreen extent -1.6,-0.82 0.8,0.82, body extent -0.83,-0.4 0.77,0.4, height 0.55
ONSC-TO-220-3-221A-09 [mm] "FM, 3-Leads, Body 10.3x4.85mm, Pitch 2.54mm"
  rect 2.2x1.8 hole 1.1: 1(0,2.54)
  oval 2.2x1.8 hole 1.1: 2(0,0) 3(0,-2.54)
  silkscreen extent -2.2,-5.15 2.7,5.92, body extent -2.18,-5.15 2.67,5.15, height 19.85
"RES 1206_3216" [mm] "Chip Resistor, 2-Leads, Body 3.13x1.55mm, IPC Medium Density"
  rect 1.2x1.65 smd: 1(-1.4,0) 2(1.4,0)
  silkscreen extent -2.3,-1.1 2.3,1.1, body extent -1.6,-0.8 1.6,0.8, height 0.6
RESC3016X58N [mm]
  rect 1.85x1.75 smd: 1(-1.27,0) 2(1.27,0)
  body extent -1.53,-0.77 1.53,0.77, height 0.58
RESC3116X65N [mm]
  rect 1x1.75 smd: 1(-1.5,0) 2(1.5,0)
  silkscreen extent 0,-0.7 0,0.7, body extent -1.55,-0.8 1.55,0.8, height 0.65
S175146R [mm]
  rect 3.45x1.85 smd: 1(0,0)
  silkscreen extent 2.2,0 2.4,0.2, body extent -1.58,-0.83 1.67,0.82, height 2.05
SD15C01FTG [mm]
  rect 0.49x0.45 smd: 1(-1.14,0) 2(1.14,0)
  silkscreen extent -2.2,-0.65 0.87,0.65, body extent -1.31,-0.65 1.31,0.65, height 1
SMF15VTFTR [mm]
  rect 1.2x0.85 smd: 1(0,1.525) 2(0,-1.525)
  silkscreen extent -0.8,-0.8 0.8,2.5, body extent -0.8,-1.87 0.8,1.87, height 1
SOD2613X100N [mm]
  rect 1.1x0.5 smd: 1(-1.175,0) 2(1.175,0)
  silkscreen extent -1.73,-0.65 0.85,0.65, body extent -1.31,-0.65 1.31,0.65, height 1
SOD3716X135N [mm]
  rect 1.15x0.8 smd: 1(-1.75,0) 2(1.75,0)
  silkscreen extent -1.85,-0.8 1.35,0.8, body extent -1.86,-0.8 1.86,0.8, height 1.35
SOIC8-127P600X175-8N [mm] "SOIC, 8-Leads, Body 4.91x3.90mm, Pitch 1.27mm, IPC Medium Density"
  oval 1.55x0.6 smd: 1(-2.7,1.905) 2(-2.7,0.635) 3(-2.7,-0.635) 4(-2.7,-1.905) 5(2.7,-1.905) 6(2.7,-0.635) 7(2.7,0.635) 8(2.7,1.905)
  silkscreen extent -2.82,-2.5 1.6,2.88, body extent -3,-2.5 3,2.5, height 1.75
SOT95P275X110-5N [mm]
  rect 1.25x0.6 smd: 1(-1.25,0.95) 2(-1.25,0) 3(-1.25,-0.95) 4(1.25,-0.95) 5(1.25,0.95)
  silkscreen extent -1.88,-1.5 0.28,1.5, body extent -1.38,-1.5 1.38,1.5, height 1.1
SOT96P240X110-3N [mm]
  rect 1.1x0.65 smd: 1(-1.05,0.96) 2(-1.05,-0.96) 3(1.05,0)
  silkscreen extent -1.6,-1.45 0.15,1.54, body extent -1.2,-1.45 1.2,1.45, height 1.1
"STACKPOLE CSR2512" [mm] "Chip Resistor, 2-Leads, Body 6.40x3.20mm, IPC Medium Density"
  rect 1.6x3.1 smd: 1(-3.25,0) 2(3.25,0)
  silkscreen extent -4.3,-1.8 4.3,1.8, body extent -3.27,-1.6 3.28,1.6, height 0.5
"TE 282837-2" [mm] "Wire to Board Terminal Block Horizontal with Board, 2 Postions, Body 10.76x8.2 mm, Pitch 5.08mm"
  round 2.5 hole 1.1: 1(-2.54,0) 2(2.54,0)
  silkscreen extent -5.08,-4.1 5.68,4.1, body extent -5.08,-4.1 5.68,4.1, height 10.3
"TE 282837-3" [mm] "Wire to Board Terminal Block Horizontal with Board, 3 Postions, Body 15.84x8.2mm, Pitch 5.08mm"
  round 2.5 hole 1.1: 1(-5.08,0) 2(0,0) 3(5.08,0)
  silkscreen extent -7.62,-4.1 8.22,4.1, body extent -7.62,-4.1 8.22,4.1, height 10.3
TRANS_BUK9K18-40E,115 [mm]
  rect 1.15x0.7 smd paste-0.025: 1(-3.275,1.905) 2(-3.275,0.635) 3(-3.275,-0.635) 4(-3.275,-1.905)
  rect 1.5x1.5 smd paste-2 mask+0: 5_6(0,-1.27) 7_8(0,1.27)
  Top Layer region: 3.175,-0.985 2,-0.985 2,-1.555 3.175,-1.555 3.175,-2.255 -2.1,-2.255 -2.1,-0.285 3.175,-0.285
  Top Layer region: 3.175,1.555 2,1.555 2,0.985 3.175,0.985 3.175,0.285 -2.1,0.285 -2.1,2.255 3.175,2.255
  silkscreen extent -4.6,-2.57 2.29,2.57, body extent -3.03,-2.56 3.03,2.56, height 1.05
"YAGEO RES 1206_3216" [mm] "Chip Resistor, 2-Leads, Body 3.13x1.55mm"
  rect 1x1.5 smd: 1(-1.6,0) 2(1.6,0)
  silkscreen extent -2.4,-1 2.4,1, body extent -1.6,-0.8 1.6,0.8, height 0.6

## Part data
C1 C2 C8 C9 C11 C13 C35 C36 C42 C43 C45 C47 C50 C52: library part 885012208093, "CAP CER 1UF 50V X7R 1206", Device Package="1206 (3216 Metric)", manufacturer="Würth Elektronik", Operating Temperature="-55°C ~ 125°C", Supplier Part Number 1=732-7577-1-ND, Temperature Coefficient=X7R, Tolerance=±10%, Voltage - Rated=50V, Applications="General Purpose", Capacitance="1 µF", componentlink1description=Datasheet, componentlink1url=https://katalog.we-online.de/pbs/datasheet/885012208093.pdf, componentlink2description="DigiKey Link", componentlink2url=https://www.digikey.com/en/products/detail/würth-elektronik/885012208093/5453432, lastupdated="6/4/2024 19:10:33", Lifecycle Status=Active, Minimum Order=1, Mounting Type="Surface Mount, MLCC", Package / Case="1206 (3216 Metric)", Packaging=TapeAndReel, Part Number=885012208093, Part Status=Active, partid=39665, price=0.10, Series=WCAP-CSGP, Size / Dimension="0.126\" L x 0.063\" W (3.20mm x 1.60mm)", Supplier 1=DigiKey, Thickness (Max)="0.075\" (1.90mm)"
C3 C4 C5 C7 C10 C12 C14 C18 C22 C28 C29 C37 C38 C39 C41 C44 C46 C48 C49 C51: library part 885012208087, "CAP CER 0.1UF 50V X7R 1206", Device Package="1206 (3216 Metric)", manufacturer="Würth Elektronik", Operating Temperature="-55°C ~ 125°C", Supplier Part Number 1=732-8127-1-ND, Temperature Coefficient=X7R, Tolerance=±10%, Voltage - Rated=50V, Applications="General Purpose", Capacitance="0.1 µF", componentlink1description=Datasheet, componentlink1url=https://katalog.we-online.de/pbs/datasheet/885012208087.pdf, componentlink2description="DigiKey Link", componentlink2url=https://www.digikey.com/en/products/detail/würth-elektronik/885012208087/5453982, lastupdated="6/4/2024 19:10:27", Lifecycle Status=Active, Minimum Order=1, Mounting Type="Surface Mount, MLCC", Package / Case="1206 (3216 Metric)", Packaging=TapeAndReel, Part Number=885012208087, Part Status=Active, partid=20879, price=0.06, Series=WCAP-CSGP, Size / Dimension="0.126\" L x 0.063\" W (3.20mm x 1.60mm)", Supplier 1=DigiKey, Thickness (Max)="0.035\" (0.90mm)"
C6 C24 C33 C40: library part 1206AA470KAT1A, "CAP CER 47PF 1KV C0G/NP0 1206", Device Package="1206 (3216 Metric)", manufacturer="AVX Corporation", Operating Temperature="-55°C ~ 125°C", Supplier Part Number 1=478-2949-1-ND, Temperature Coefficient="C0G, NP0", Tolerance=±10%, Voltage - Rated="1000V (1kV)", Applications="General Purpose", Capacitance=47pF, componentlink1description=Datasheet, componentlink1url=http://datasheets.avx.com/AVX-HV_MLCC.pdf, componentlink2description="DigiKey Link", componentlink2url=http://digikey.com/product-detail/en/avx-corporation/1206AA470KAT1A/478-2949-1-ND/808148, Features="High Voltage", lastupdated="9/2/2020 01:05:31", Lifecycle Status=Active, Minimum Order=1, Mounting Type="Surface Mount, MLCC", Package / Case="1206 (3216 Metric)", Packaging=TapeAndReel, Part Number=1206AA470KAT1A, Part Status=Active, partid=21825, price=0.11, Series=-, Size / Dimension="0.130\" L x 0.063\" W (3.30mm x 1.60mm)", Supplier 1=DigiKey, Thickness (Max)="0.071\" (1.80mm)"
C15 C16 C19 C20: library part 50TZV100M8X10.5, "CAP ALUM 100UF 20% 50V SMD", Device Package="Radial, Can - SMD", Lifetime @ Temp.="2000 Hrs @ 105°C", manufacturer=Rubycon, Operating Temperature="-55°C ~ 105°C", Ratings=AEC-Q200, Ripple Current @ High Frequency="350 mA @ 100 kHz", Ripple Current @ Low Frequency="175 mA @ 120 Hz", Supplier Part Number 1=1189-1651-1-ND, Tolerance=±20%, Voltage - Rated="50 V", Applications=Automotive, Capacitance="100 µF", componentlink1description=Datasheet, componentlink1url=http://www.rubycon.co.jp/en/catalog/e_pdfs/aluminum/e_tzv.pdf, componentlink2description="DigiKey Link", componentlink2url=https://www.digikey.com/en/products/detail/rubycon/50TZV100M8X10-5/3134931, Height - Seated (Max)="0.413\" (10.50mm)", Impedance="340 mOhms", lastupdated="6/3/2024 20:15:48", Lifecycle Status=Active, Minimum Order=1, Mounting Type="Surface Mount", Package / Case="Radial, Can - SMD", Packaging=TapeAndReel, Part Number=50TZV100M8X10.5, Part Status=Active, partid=7533, Polarization=Polar, price=0.16, Series=TZV, Size / Dimension="0.315\" Dia (8.00mm)", Supplier 1=DigiKey, Surface Mount Land Size="0.327\" L x 0.327\" W (8.30mm x 8.30mm)"
C17 C21 C23 C34: library part 885012208069, "CAP CER 10UF 25V X7R 1206", Device Package="1206 (3216 Metric)", manufacturer="Würth Elektronik", Operating Temperature="-55°C ~ 125°C", Supplier Part Number 1=732-7574-1-ND, Temperature Coefficient=X7R, Tolerance=±10%, Voltage - Rated=25V, Applications="General Purpose", Capacitance="10 µF", componentlink1description=Datasheet, componentlink1url=https://katalog.we-online.de/pbs/datasheet/885012208069.pdf, componentlink2description="DigiKey Link", componentlink2url=https://www.digikey.com/en/products/detail/würth-elektronik/885012208069/5453429, lastupdated="6/4/2024 19:10:32", Lifecycle Status=Active, Minimum Order=1, Mounting Type="Surface Mount, MLCC", Package / Case="1206 (3216 Metric)", Packaging=TapeAndReel, Part Number=885012208069, Part Status=Active, partid=43199, price=0.40, Series=WCAP-CSGP, Size / Dimension="0.126\" L x 0.063\" W (3.20mm x 1.60mm)", Supplier 1=DigiKey, Thickness (Max)="0.075\" (1.90mm)"
C25 C26 C27 C30 C31 C32: library part 885382208001, "CAP CER 2.2UF 25V X7R 1206", Device Package="1206 (3216 Metric)", manufacturer="Würth Elektronik", Operating Temperature="-55°C ~ 125°C", Supplier Part Number 1=732-13199-1-ND, Temperature Coefficient=X7R, Tolerance=±10%, Voltage - Rated=25V, Applications="Boardflex Sensitive", Capacitance="2.2 µF", componentlink2description="DigiKey Link", componentlink2url=https://www.digikey.com/en/products/detail/würth-elektronik/885382208001/9816354, Features="Soft Termination", lastupdated="6/4/2024 19:10:38", Lifecycle Status=Active, Minimum Order=1, Mounting Type="Surface Mount, MLCC", Package / Case="1206 (3216 Metric)", Packaging=TapeAndReel, Part Number=885382208001, Part Status=Active, partid=45904, price=0.35, Series=WCAP-CSST, Size / Dimension="0.126\" L x 0.063\" W (3.20mm x 1.60mm)", Supplier 1=DigiKey, Thickness (Max)="0.083\" (2.10mm)"
D1 D5: "TVS Diode (Bi-directional)", Manufacturer_Name=LITTELFUSE, Mouser Part Number=576-SD15C-01FTG, Arrow Part Number=SD15C-01FTG, Arrow Price/Stock=https://www.arrow.com/en/products/sd15c-01ftg/littelfuse?region=nac, Datasheet Link=https://www.arrow.com/en/products/sd15c-01ftg/littelfuse, Height=1.14mm, Manufacturer_Part_Number=SD15C-01FTG, Mouser Price/Stock=https://www.mouser.co.uk/ProductDetail/Littelfuse/SD15C-01FTG?qs=4zl93aaztU8pjSvpxpJP6g%3D%3D
D2 D6: "TVS Diode (Bi-directional)", Manufacturer_Name=LITTELFUSE, Mouser Part Number=576-AQW05C-01FTG, Datasheet Link=https://www.littelfuse.com/media?resourcetype=datasheets&itemid=80ae0bbb-a157-46a1-97eb-84c82c82e9e5&filename=littelfuse-tvs-diode-array-aqw05c-01ftg-datasheet, Height=1mm, Manufacturer_Part_Number=AQW05C-01FTG, Mouser Price/Stock=https://www.mouser.co.uk/ProductDetail/Littelfuse/AQW05C-01FTG?qs=Z%252BL2brAPG1JHH8XKoKQPyw%3D%3D
D3 D4: "Zener Diode", Manufacturer_Name=onsemi, Mouser Part Number=863-MMSZ4678T1G, Arrow Part Number=MMSZ4678T1G, Arrow Price/Stock=https://www.arrow.com/en/products/mmsz4678t1g/on-semiconductor?utm_currency=USD&region=europe, Datasheet Link=http://www.onsemi.com/pub/Collateral/MMSZ4678T1-D.PDF, Height=1.35mm, Manufacturer_Part_Number=MMSZ4678T1G, Mouser Price/Stock=https://www.mouser.co.uk/ProductDetail/onsemi/MMSZ4678T1G?qs=P4IOph%252Bbot8vK8FZ3ltvyA%3D%3D
F1 F4: "Fuse", Manufacturer_Name=Bel, Mouser Part Number=530-0ZCH0005FF2E, Datasheet Link=https://www.belfuse.com/resources/datasheets/circuitprotection/ds-cp-0zch-series.pdf, Height=1.15mm, Manufacturer_Part_Number=0ZCH0005FF2E
F2 F3: "Resettable Fuse", Manufacturer_Name=LITTELFUSE, Mouser Part Number=576-2920L075, Arrow Part Number=2920L075DR, Arrow Price/Stock=https://www.arrow.com/en/products/2920l075dr/littelfuse?utm_currency=USD&region=europe, Datasheet Link=https://www.littelfuse.com/~/media/electronics/datasheets/resettable_ptcs/littelfuse_ptc_2920l_datasheet.pdf.pdf, Height=1.25mm, Manufacturer_Part_Number=2920L075DR, Mouser Price/Stock=https://www.mouser.co.uk/ProductDetail/Littelfuse/2920L075DR?qs=SJZ%252BTX%252BI2BR6aMN5vUbCzw%3D%3D
FID1 FID2 FID3 FID4 FID5 FID6 FID7 FID8: library part CMP-0288-0A, "Fiducial, Round, D=4mm (inner D=1mm)", manufacturer=KONČAR, Component Type="Mechanical Parts", ManufacturerPartNumber=FID_RND, MountingType=SMD, PartStatus=Active, ValueNumeric=FID_RND
HS1 HS2 HS3 HS4: library part 593002B03400G, "593002B03400G Heatsink TO220 13.4 C/W", Manufacturer_Name="Aavid Thermalloy", Mouser Part Number=532-593002B03400G, Arrow Part Number=593002B03400G, Arrow Price/Stock=https://www.arrow.com/en/products/593002b03400g/aavid-thermalloy, Datasheet Link=3dofAavidThermalloy593002B03400G, Height=29.97mm, Manufacturer_Part_Number=593002B03400G, Mouser Price/Stock=https://www.mouser.co.uk/ProductDetail/Aavid/593002B03400G?qs=W5RTpZXIxnNcIJ9LzCiOiQ%3D%3D
IC1 IC2 IC3 IC4: library part LM431CCM3/NOPB, "Integrated Circuit", Manufacturer_Name="Texas Instruments", Mouser Part Number=926-LM431CCM3/NOPB, Arrow Part Number=LM431CCM3/NOPB, Arrow Price/Stock=https://www.arrow.com/en/products/lm431ccm3nopb/texas-instruments?utm_currency=USD&region=nac, Datasheet Link=http://www.ti.com/lit/gpn/lm431, Height=1.12mm, Manufacturer_Part_Number=LM431CCM3/NOPB, Mouser Price/Stock=https://www.mouser.co.uk/ProductDetail/Texas-Instruments/LM431CCM3-NOPB?qs=QbsRYf82W3GICygfDXnqiw%3D%3D
IC5 IC6: "Integrated Circuit", Manufacturer_Name=onsemi, Mouser Part Number=863-LM321SN3T1G, Arrow Part Number=LM321SN3T1G, Arrow Price/Stock=https://www.arrow.com/en/products/lm321sn3t1g/on-semiconductor?utm_currency=USD&region=nac, Datasheet Link=https://www.onsemi.com/pub/Collateral/LM321-D.PDF, Height=1.1mm, Manufacturer_Part_Number=LM321SN3T1G, Mouser Price/Stock=https://www.mouser.co.uk/ProductDetail/onsemi/LM321SN3T1G?qs=slMPpRTKD5qNVsCzBsHVZA%3D%3D
J1 J36: "Connector", Manufacturer_Name=SAMTEC, Mouser Part Number=200-TD107GAA, Arrow Part Number=TD-107-G-AA, Arrow Price/Stock=https://www.arrow.com/en/products/td-107-g-aa/samtec, Datasheet Link=https://suddendocs.samtec.com/catalog_english/td.pdf?_gl=1*1wt4qt0*_ga*MTEzMjQwMzYxOS4xNjk3ODEzMDcx*_ga_3KFNZC07WW*MTcxMjgzNDUyOC40My4xLjE3MTI4MzQ1ODguNjAuMC4w, Height=8.18mm, Manufacturer_Part_Number=TD-107-G-AA, Mouser Price/Stock=https://www.mouser.co.uk/ProductDetail/Samtec/TD-107-G-AA?qs=0lQeLiL1qybxLJvA9lDIZA%3D%3D
J2 J37: "TERM BLK 2P SIDE ENT 5.08MM PCB", Color=Green, Current="13.5 A", manufacturer="TE Connectivity AMP Connectors", Supplier Part Number 1=A113320-ND, Voltage="300 V", componentlink1description=Datasheet, componentlink1url=https://www.te.com/commerce/DocumentDelivery/DDEController?Action=srchrtrv&DocNm=282837&DocType=Customer+Drawing&DocLang=English, componentlink2description="DigiKey Link", componentlink2url=https://www.digikey.com/en/products/detail/te-connectivity-amp-connectors/282837-2/2187973, Features="Interlocking (Side)", lastupdated="6/21/2022 15:00:23", Lifecycle Status=Active, Mating Orientation="Horizontal with Board", Minimum Order=1, Mounting Type="Through Hole", Number of Levels=1, Packaging=Tray, Part Number=282837-2, Part Status=Active, Pitch="0.200\" (5.08mm)", Positions Per Level=2, price=0.31, Series=Buchanan, Supplier 1=DigiKey, Wire Gauge="16-28 AWG", Wire Termination="Screw - Rising Cage Clamp"
J3 J4 J6 J7 J8 J9 J10 J12 J13 J14 J15 J16 J17 J18 J19 J20 J21 J23 J24 J25 J26 J27 J28 J31 J32 J33 J34 J35 J38 J39 J41 J42 J43 J44 J45 J47 J48 J49 J50 J51 J52 J53 J54 J55 J56 J57: library part 5001, "PC TEST POINT MINIATURE BLACK", Color=Black, Flammability Rating="UL94 V-0", Package Quantity=100, Supplier Part Number 1=534-5001, Body Material=Bronze, Contact Material=Bronze, Contact Plating=Silver, Diameter=2.54mm, Height=0.3inch, Hole Diameter=1.6mm, Housing Color=Black, Inside Diameter=1.27mm, Insulation=Insulated, Insulation Material=Nylon, Lead Free="Lead Free", Length=7.62mm, Material=Nylon, Mount="Through Hole", Number of Contacts=1, Number of Ports=1, Orientation=Straight, Outside Diameter=2.54mm, Packaging=Bulk, Plating=Silver, REACH SVHC="No SVHC", RoHS Compliant=Yes, Series=THM, Supplier 1=Mouser, Termination="Through Hole"
J5 J40: "Connector", Manufacturer_Name="TE Connectivity", Mouser Part Number=571-5414373-1, Arrow Part Number=5414373-1, Arrow Price/Stock=https://www.arrow.com/en/products/5414373-1/te-connectivity?utm_currency=USD&region=nac, Datasheet Link=https://www.te.com/commerce/DocumentDelivery/DDEController?Action=srchrtrv&DocNm=1307191_BNC_Connectors&DocType=Catalog%20Section&DocLang=English&PartCntxt=5414373-1&DocFormat=pdf, Height=8.64mm, Manufacturer_Part_Number=5414373-1, Mouser Price/Stock=https://www.mouser.co.uk/ProductDetail/TE-Connectivity/5414373-1?qs=TEPVm9Ho6Ekg6JV7ffLu5g%3D%3D
J11 J46: "Connector", Manufacturer_Name=SparkFun, Mouser Part Number=474-PRT-12807, Arrow Part Number=PRT-12807, Arrow Price/Stock=https://www.arrow.com/en/products/prt-12807/sparkfun-electronics, Datasheet Link=https://cdn.sparkfun.com/datasheets/Prototyping/00989.pdf, Height=8.84mm, Manufacturer_Part_Number=PRT-12807, Mouser Price/Stock=https://www.mouser.co.uk/ProductDetail/SparkFun/PRT-12807?qs=WyAARYrbSnYnpz4kKzOm4A%3D%3D
J22: "TERM BLK 3P SIDE ENT 5.08MM PCB", Color=Green, Current="13.5 A", manufacturer="TE Connectivity AMP Connectors", Supplier Part Number 1=A113321-ND, Voltage="300 V", componentlink1description=Datasheet, componentlink1url=https://www.te.com/commerce/DocumentDelivery/DDEController?Action=srchrtrv&DocNm=282837&DocType=Customer+Drawing&DocLang=English, componentlink2description="DigiKey Link", componentlink2url=https://www.digikey.com/en/products/detail/te-connectivity-amp-connectors/282837-3/2187974, Features="Interlocking (Side)", lastupdated="6/21/2022 15:00:39", Lifecycle Status=Active, Mating Orientation="Horizontal with Board", Minimum Order=1, Mounting Type="Through Hole", Number of Levels=1, Packaging=Tray, Part Number=282837-3, Part Status=Active, Pitch="0.200\" (5.08mm)", Positions Per Level=3, price=0.47, Series=Buchanan, Supplier 1=DigiKey, Wire Gauge="16-28 AWG", Wire Termination="Screw - Rising Cage Clamp"
J29 J30: "Connector", Manufacturer_Name=Harwin, Mouser Part Number=855-M20-9990346, Datasheet Link=https://cdn.harwin.com/pdfs/M20-999.pdf, Height=8.64mm, Manufacturer_Part_Number=M20-9990346, Mouser Price/Stock=https://www.mouser.co.uk/ProductDetail/Harwin/M20-9990346?qs=ulE8k0yEMYbyhQ3uXpFs8Q%3D%3D
L1 L2: library part AMRM00101040330MA1, "Inductor", Manufacturer_Name="Pulse Electronics", Mouser Part Number=673-AMRM101040330MA1, Datasheet Link=https://productfinder.pulseelectronics.com/api/open/part-attachments/datasheet/amrm00101040330ma1, Height=4mm, Manufacturer_Part_Number=AMRM00101040330MA1, Mouser Price/Stock=https://www.mouser.co.uk/ProductDetail/Pulse-Electronics/AMRM00101040330MA1?qs=HoCaDK9Nz5eI6M5ad0CXDA%3D%3D
L3 L4: "Shielded Multilayer Inductor 3.3uH ±20% 500mA 260mΩ SMD 0805", Case Code (Imperial)=0805, Case Code (Metric)=2012, Current Rating=500mA, DC Resistance (DCR)=260mR, Inductance=3.3uH, Max Operating Temperature=125°C, Min Operating Temperature=-55°C, Package Quantity=2000, Saturation Current=350mA, Tolerance=20%, Case/Package=0805, Core Material=Ferrite, Height - Seated (Max)=0.057inch, Lead Free="Lead Free", Length=0.079inch, Mount="Surface Mount", Packaging="Tape and Reel", RoHS Compliant=Yes, Shielding=Shielded, Width=0.049inch
LED1 LED2: "LED", Manufacturer_Name=Lite-On, Mouser Part Number=859-LTST-C191KRKT, Arrow Part Number=LTST-C191KRKT, Arrow Price/Stock=https://www.arrow.com/en/products/ltst-c191krkt/lite-on-technology?utm_currency=USD&region=nac, Datasheet Link=http://www.mouser.com/ds/2/239/S_110_LTST-C191KRKT-539838.pdf, Height=0.55mm, Manufacturer_Part_Number=LTST-C191KRKT, Mouser Price/Stock=https://www.mouser.co.uk/ProductDetail/LITEON/LTST-C191KRKT?qs=BAIUz4Y8PJBLfOhzue0q%252BA%3D%3D
Q1 Q9: "Complementary Silicon Plastic Power Transistor, 3-Pin TO-220, Tube", manufacturer="On Semiconductor", Supplier Part Number 1=TIP32COS-ND, componentlink1description="Manufacturer URL", componentlink1url=http://www.onsemi.com/, componentlink2description=Datasheet, componentlink2url=http://www.onsemi.com/pub_link/Collateral/TIP31A-D.PDF, ComponentLink3Description="Package Specification", ComponentLink3URL=http://www.onsemi.com/pub_link/Collateral/221A-09.PDF, DatasheetVersion="Rev. 14", fT Min (MHz)=3, IC Continuous (A)=3, Mounting Technology="Through Hole", PackageDescription="3-Pin Flange Mount, Vertical Straight Lead, Body 9.97 x 4.445 mm, Pitch 2.54 mm", PackageReference=TO-220-3-221A-09, PackageVersion="Rev. AG, 09/2011", Packing=Tube, PartNumber=TIP32C, Polarity=PNP, RoHS=FALSE, Supplier 1=Digi-Key
Q2 Q3: library part PHPT610030NPK, componentlink1description=Datasheet, componentlink1url=https://assets.nexperia.com/documents/data-sheet/PHPT610030NPK.pdf, componentlink2description=Supplier, componentlink2url=https://hr.mouser.com/ProductDetail/Nexperia/PHPT610030NPKX?qs=%252BRKXB2WKlSeoXKhT5DAScw%3D%3D
Q4 Q10: "Complementary Silicon Plastic Power Transistor, 3-Pin TO-220, Tube", manufacturer="On Semiconductor", Supplier Part Number 1=TIP31COS-ND, componentlink1description="Manufacturer URL", componentlink1url=http://www.onsemi.com/, componentlink2description=Datasheet, componentlink2url=http://www.onsemi.com/pub_link/Collateral/TIP31A-D.PDF, ComponentLink3Description="Package Specification", ComponentLink3URL=http://www.onsemi.com/pub_link/Collateral/221A-09.PDF, DatasheetVersion="Rev. 14", fT Min (MHz)=3, IC Continuous (A)=3, Mounting Technology="Through Hole", PackageDescription="3-Pin Flange Mount, Vertical Straight Lead, Body 9.97 x 4.445 mm, Pitch 2.54 mm", PackageReference=TO-220-3-221A-09, PackageVersion="Rev. AG, 09/2011", Packing=Tube, PartNumber=TIP31C, Polarity=NPN, RoHS=FALSE, Supplier 1=Digi-Key
Q5: library part DMP3125L-7, "MOSFET P-CH 30V 2.5A SOT23", Current - Continuous Drain (Id) @ 25°C="2.5A (Ta)", Drain to Source Voltage (Vdss)="30 V", Drive Voltage (Max Rds On,  Min Rds On)="4.5V, 10V", Input Capacitance (Ciss) (Max) @ Vds="254 pF @ 25 V", manufacturer="Diodes Incorporated", Operating Temperature="-55°C ~ 150°C (TJ)", Package / Case="TO-236-3, SC-59, SOT-23-3", Power Dissipation (Max)="650mW (Ta)", Supplier Device Package=SOT-23-3, Supplier Part Number 1=DMP3125L-7DICT-ND, componentlink1description=Datasheet, componentlink1url=https://www.diodes.com/assets/Datasheets/DMP3125L.pdf, componentlink2description="DigiKey Link", componentlink2url=https://www.digikey.com/en/products/detail/diodes-incorporated/DMP3125L-7/8275358, FET Type=P-Channel, Gate Charge (Qg) (Max) @ Vgs="3.1 nC @ 4.5 V", lastupdated="6/3/2024 20:15:20", Lifecycle Status=Active, Minimum Order=1, Mounting Type="Surface Mount", Packaging=TapeAndReel, Part Number=DMP3125L-7, Part Status=Active, price=0.05, Rds On (Max) @ Id, Vgs="95mOhm @ 3.8A, 10V", Series=-, Supplier 1=DigiKey, Technology="MOSFET (Metal Oxide)", Vgs (Max)=±20V, Vgs(th) (Max) @ Id="2.1V @ 250µA"
Q8: "MOSFET (N-Channel)", Manufacturer_Name="Diodes Incorporated", Mouser Part Number=621-DMG3406L-13, Arrow Part Number=DMG3406L-13, Arrow Price/Stock=https://www.arrow.com/en/products/dmg3406l-13/diodes-incorporated?region=nac, Datasheet Link=https://www.diodes.com//assets/Datasheets/DMG3406L.pdf, Height=1.1mm, Manufacturer_Part_Number=DMG3406L-13, Mouser Price/Stock=https://www.mouser.co.uk/ProductDetail/Diodes-Incorporated/DMG3406L-13?qs=BvpHGKeVh3r%252BRZTTCOfjpg%3D%3D
R1 R6 R46 R51: library part ERA-3AEB302V, "Resistor", Manufacturer_Name=Panasonic, Mouser Part Number=667-ERA-3AEB302V, Arrow Part Number=ERA-3AEB302V, Arrow Price/Stock=https://www.arrow.com/en/products/era-3aeb302v/panasonic?utm_currency=USD&region=nac, Datasheet Link=https://industrial.panasonic.com/cdbs/www-data/pdf/RDM0000/AOA0000C307.pdf, Height=0.55mm, Manufacturer_Part_Number=ERA-3AEB302V, Mouser Price/Stock=https://www.mouser.co.uk/ProductDetail/Panasonic/ERA-3AEB302V?qs=NcBTt3PsE6X1AHNczabKdw%3D%3D
R2 R5 R47 R50: library part TNPW06037K96BEEA, "Resistor", Arrow Part Number=ERA-3AEB302V, Manufacturer_Name=Panasonic, Mouser Part Number=667-ERA-3AEB302V, Arrow Price/Stock=https://www.arrow.com/en/products/era-3aeb302v/panasonic?utm_currency=USD&region=nac, Datasheet Link=https://industrial.panasonic.com/cdbs/www-data/pdf/RDM0000/AOA0000C307.pdf, Height=0.55mm, Manufacturer_Part_Number=ERA-3AEB302V, Mouser Price/Stock=https://www.mouser.co.uk/ProductDetail/Panasonic/ERA-3AEB302V?qs=NcBTt3PsE6X1AHNczabKdw%3D%3D
R3 R4 R48 R49: library part RT0603BRD0724K6L, "Resistor", Arrow Part Number=ERA-3AEB302V, Manufacturer_Name=Panasonic, Mouser Part Number=667-ERA-3AEB302V, Arrow Price/Stock=https://www.arrow.com/en/products/era-3aeb302v/panasonic?utm_currency=USD&region=nac, Datasheet Link=https://industrial.panasonic.com/cdbs/www-data/pdf/RDM0000/AOA0000C307.pdf, Height=0.55mm, Manufacturer_Part_Number=ERA-3AEB302V, Mouser Price/Stock=https://www.mouser.co.uk/ProductDetail/Panasonic/ERA-3AEB302V?qs=NcBTt3PsE6X1AHNczabKdw%3D%3D
R7 R13 R14 R29 R31 R52 R58 R59 R74 R76: library part ERA-8AEB202V, "RES SMD 2K OHM 0.1% 1/4W 1206", Device Package="1206 (3216 Metric)", manufacturer="Panasonic Electronic Components", Operating Temperature="-55°C ~ 155°C", Power (Watts)="0.25W, 1/4W", Ratings=AEC-Q200, Supplier Device Package=1206, Supplier Part Number 1=P2.0KBCCT-ND, Temperature Coefficient=±25ppm/°C, Tolerance=±0.1%, componentlink1description=Datasheet, componentlink1url=https://industrial.panasonic.com/cdbs/www-data/pdf/RDM0000/AOA0000C307.pdf, componentlink2description="DigiKey Link", componentlink2url=https://www.digikey.com/en/products/detail/panasonic-electronic-components/ERA-8AEB202V/3070866, Composition="Thin Film", Features="Automotive AEC-Q200", Height - Seated (Max)="0.028\" (0.70mm)", lastupdated="2/9/2024 20:54:17", Lifecycle Status=Active, Minimum Order=1, Number of Terminations=2, Package / Case="1206 (3216 Metric)", Packaging=TapeAndReel, Part Number=ERA-8AEB202V, Part Status=Active, partid=34011, price=0.10, Resistance="2 kOhms", Series=ERA-8A, Size / Dimension="0.126\" L x 0.063\" W (3.20mm x 1.60mm)", Supplier 1=DigiKey
R8 R53: library part RT1206FRE07680RL, "RES SMD 680 OHM 1% 1/4W 1206", Device Package="1206 (3216 Metric)", manufacturer=Yageo, Operating Temperature="-55°C ~ 155°C", Power (Watts)="0.25W, 1/4W", Supplier Device Package=1206, Supplier Part Number 1=13-RT1206FRE07680RLCT-ND, Temperature Coefficient=±50ppm/°C, Tolerance=±1%, componentlink1description=Datasheet, componentlink1url=https://www.yageo.com/upload/media/product/productsearch/datasheet/rchip/PYu-RT_1-to-0.01_RoHS_L_12.pdf, componentlink2description="DigiKey Link", componentlink2url=https://www.digikey.com/en/products/detail/yageo/RT1206FRE07680RL/1083328, Composition="Thin Film", Height - Seated (Max)="0.026\" (0.65mm)", lastupdated="7/25/2024 09:21:22", Lifecycle Status=Active, Minimum Order=1, Number of Terminations=2, Package / Case="1206 (3216 Metric)", Packaging=TapeAndReel, Part Number=RT1206FRE07680RL, Part Status=Active, partid=58036, price=0.01, Resistance="680 Ohms", Series=RT, Size / Dimension="0.122\" L x 0.063\" W (3.10mm x 1.60mm)", Supplier 1=DigiKey
R9 R10 R17 R27 R54 R55 R62 R72: library part RT1206FRE072K2L, "Resistor", Manufacturer_Name=YAGEO, Mouser Part Number=603-RT1206FRE072K2L, Arrow Part Number=RT1206FRE072K2L, Arrow Price/Stock=https://www.arrow.com/en/products/rt1206fre072k2l/yageo?utm_currency=USD&region=nac, Datasheet Link=https://www.mouser.com/datasheet/2/447/PYu_RT_1_to_0_01_RoHS_L_12-3003070.pdf, Height=0.65mm, Manufacturer_Part_Number=RT1206FRE072K2L, Mouser Price/Stock=https://www.mouser.co.uk/ProductDetail/YAGEO/RT1206FRE072K2L?qs=yNCrj0CQcyJif6VASMbdeQ%3D%3D